# Altium PCB PCB1.PcbDoc (part 1 of 2)
Units mil, origin at the board's own origin, x right, y up, seen from the top; angles counter-clockwise.
Board outline 2600 x 2600 mil, 4 copper layers (Top Layer, Layer 1, Layer 2, Bottom Layer), stack 68.756 mil thick; 75 components, 74 nets, 370 pads, 169 vias.
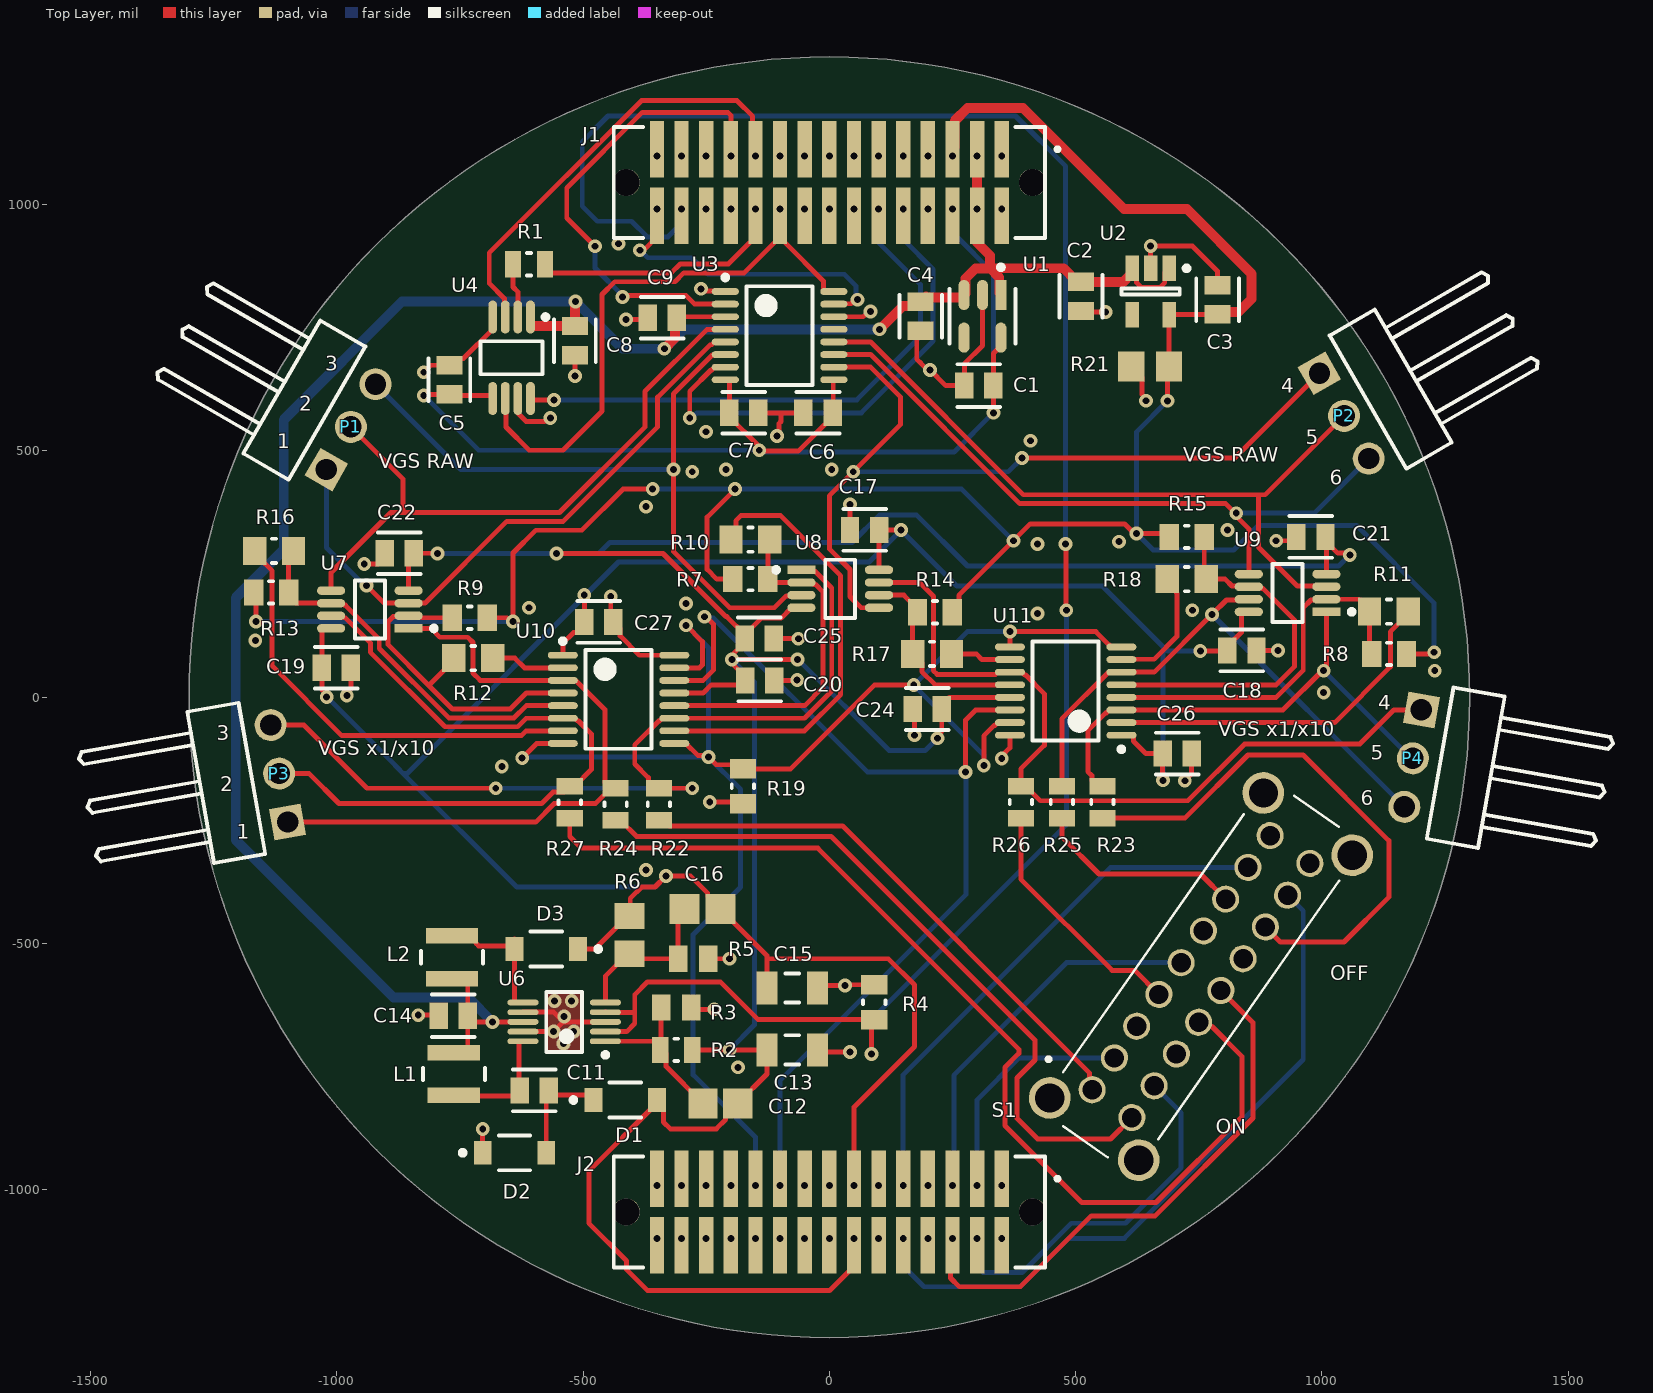
[diagram p0: Top Layer view]
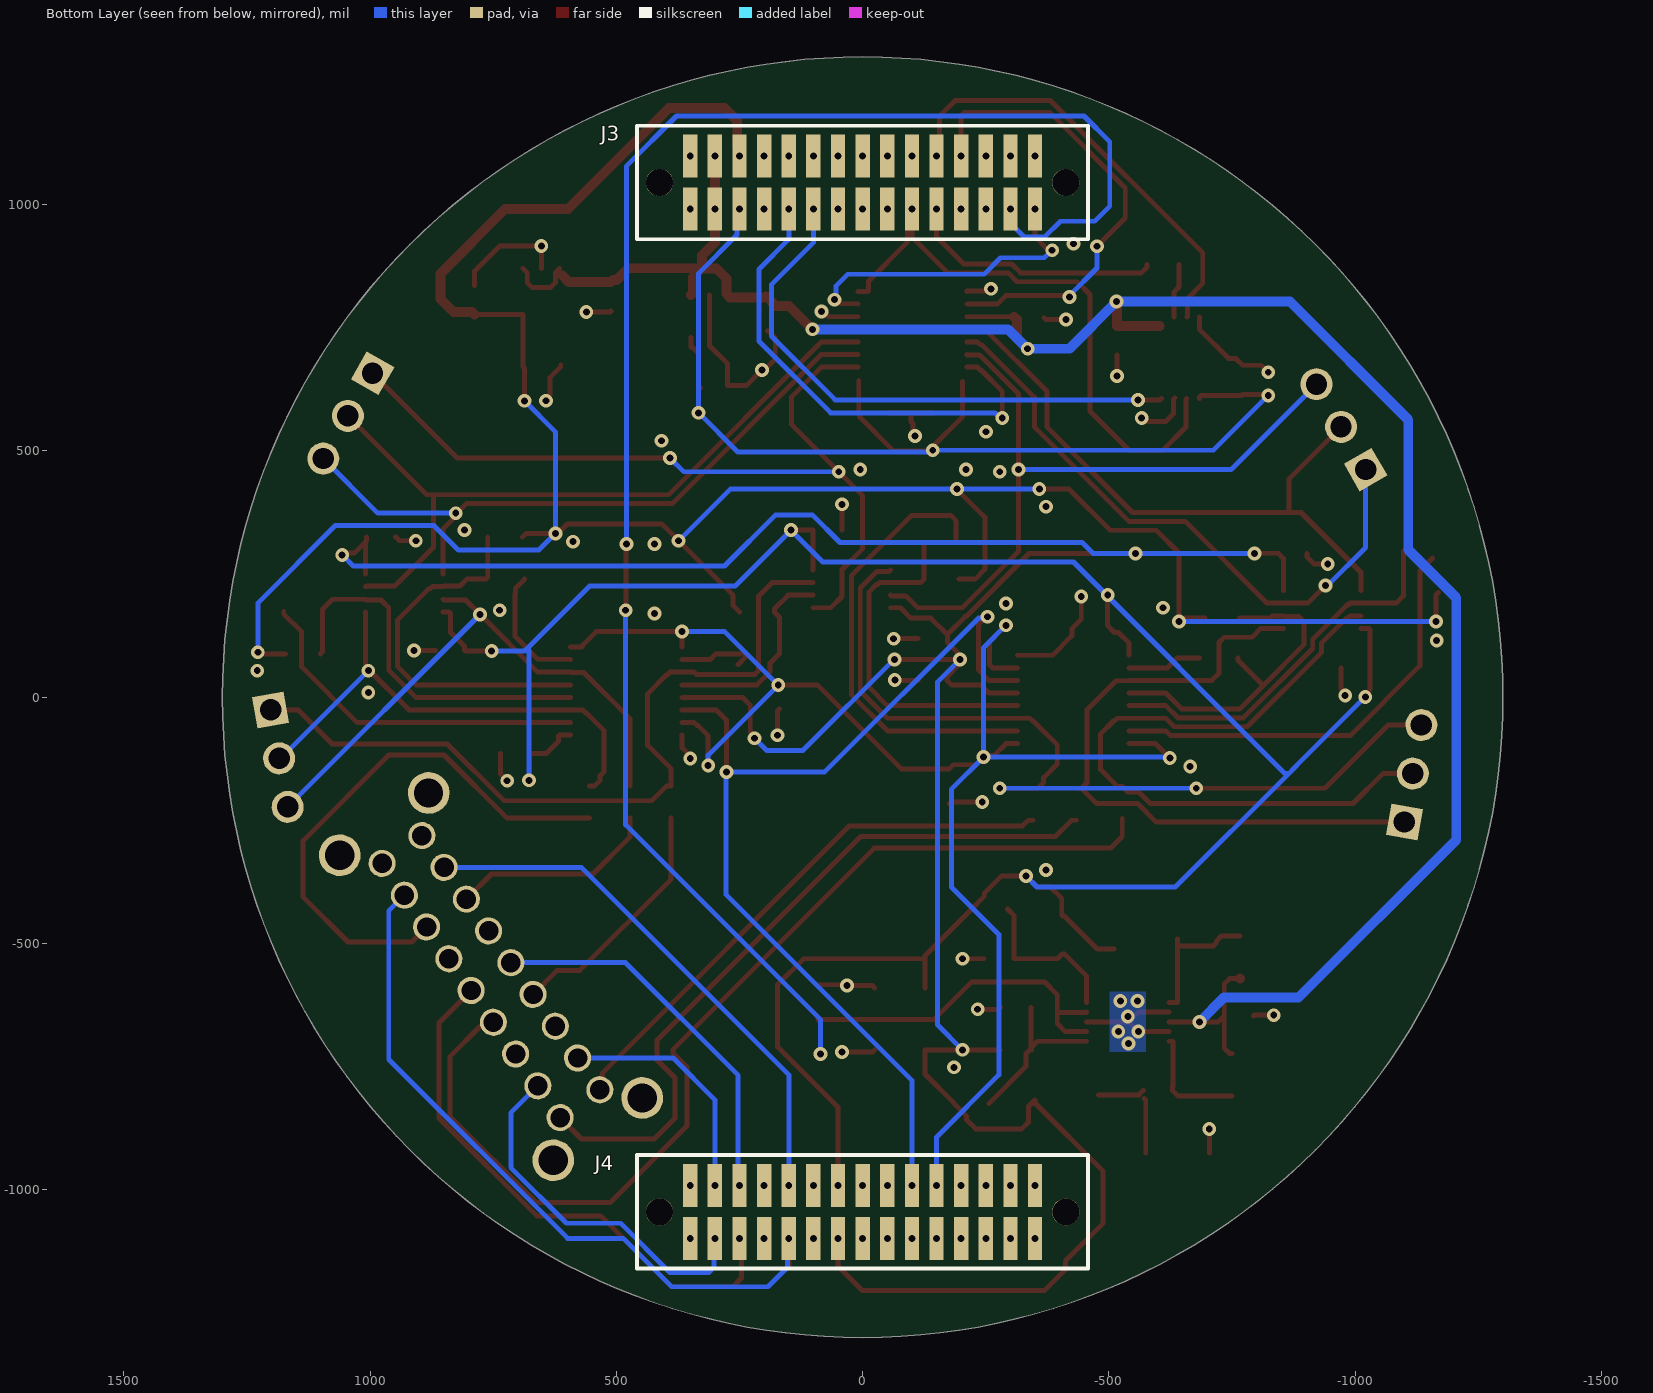
[diagram p1: Bottom Layer view, seen from below]
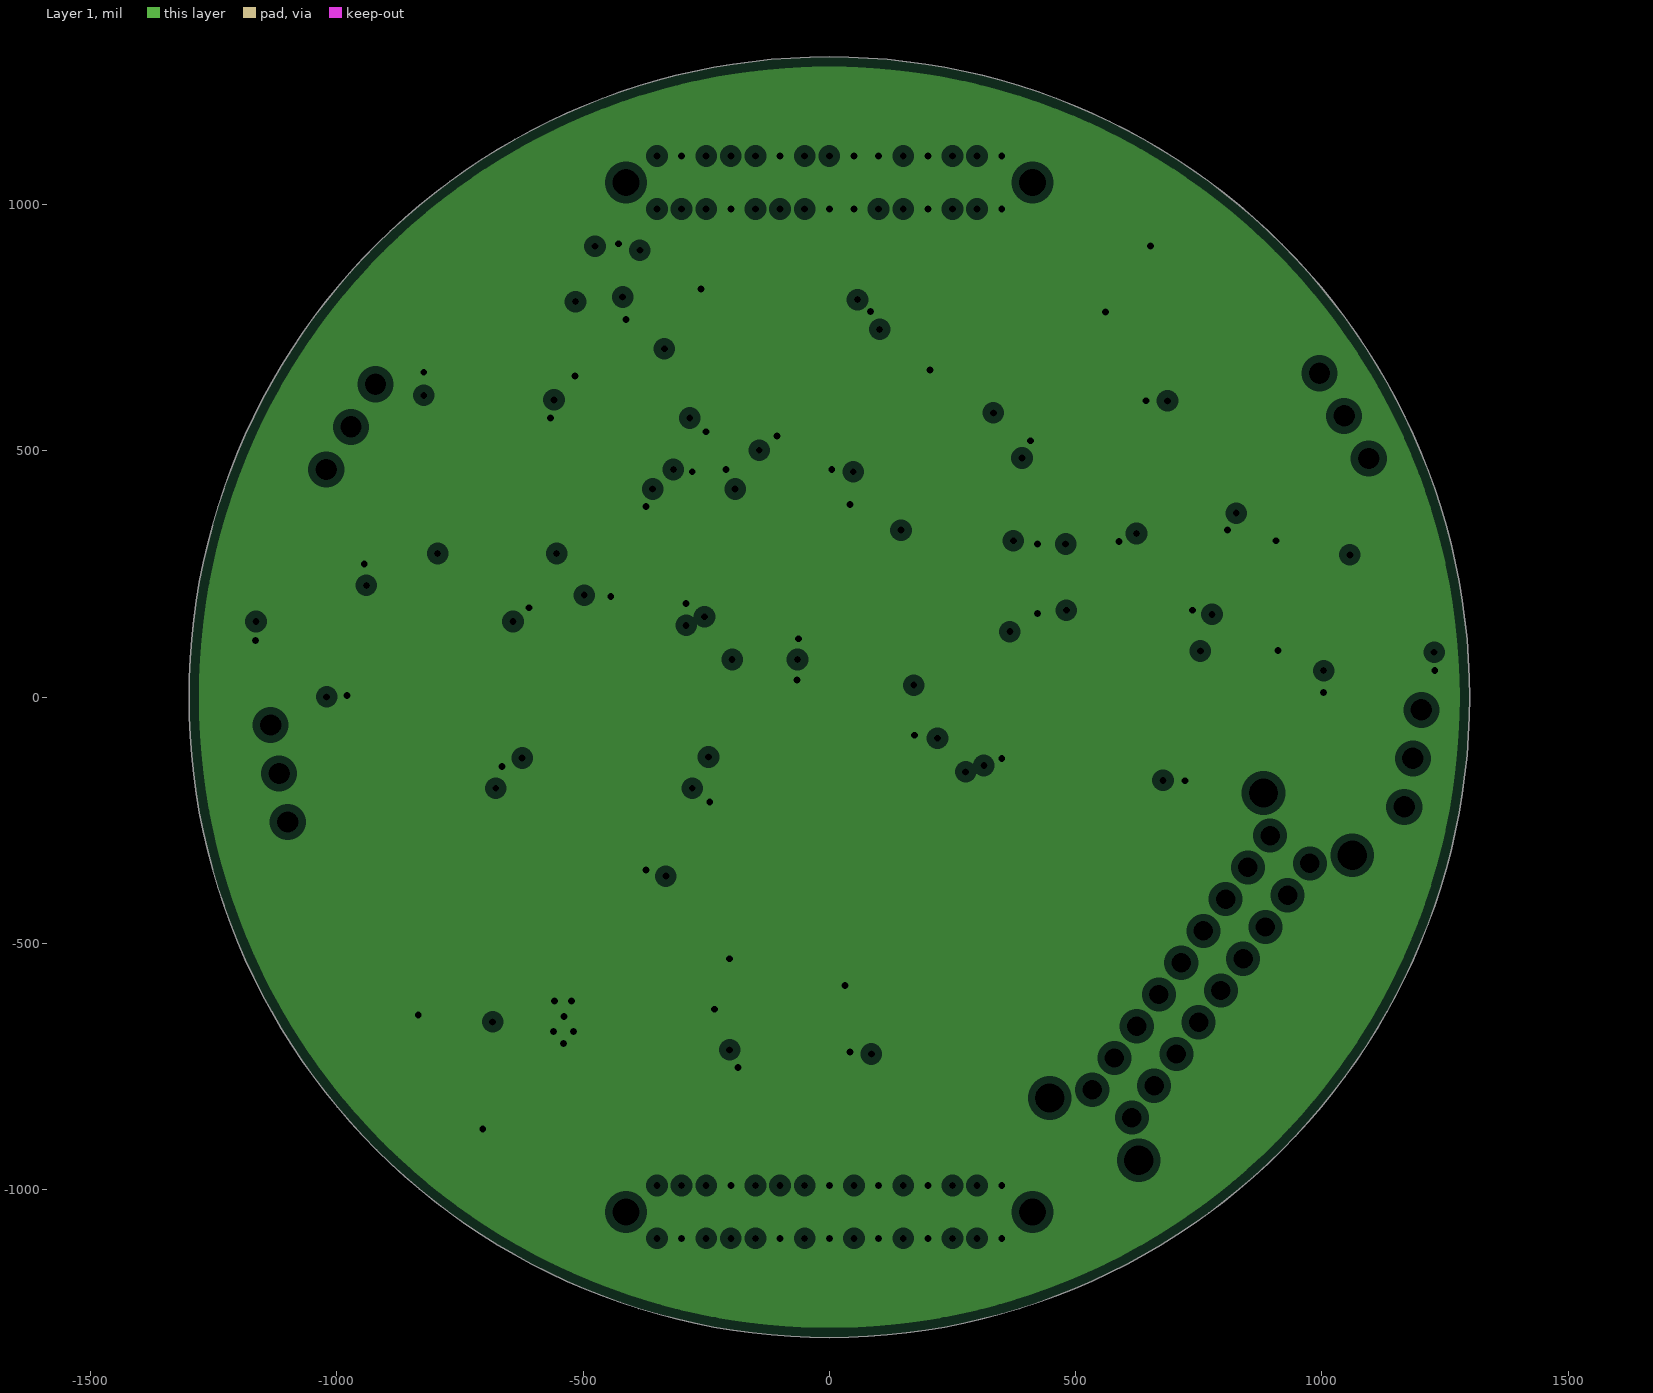
[diagram p2: Layer 1, clearances drawn from the general rule]
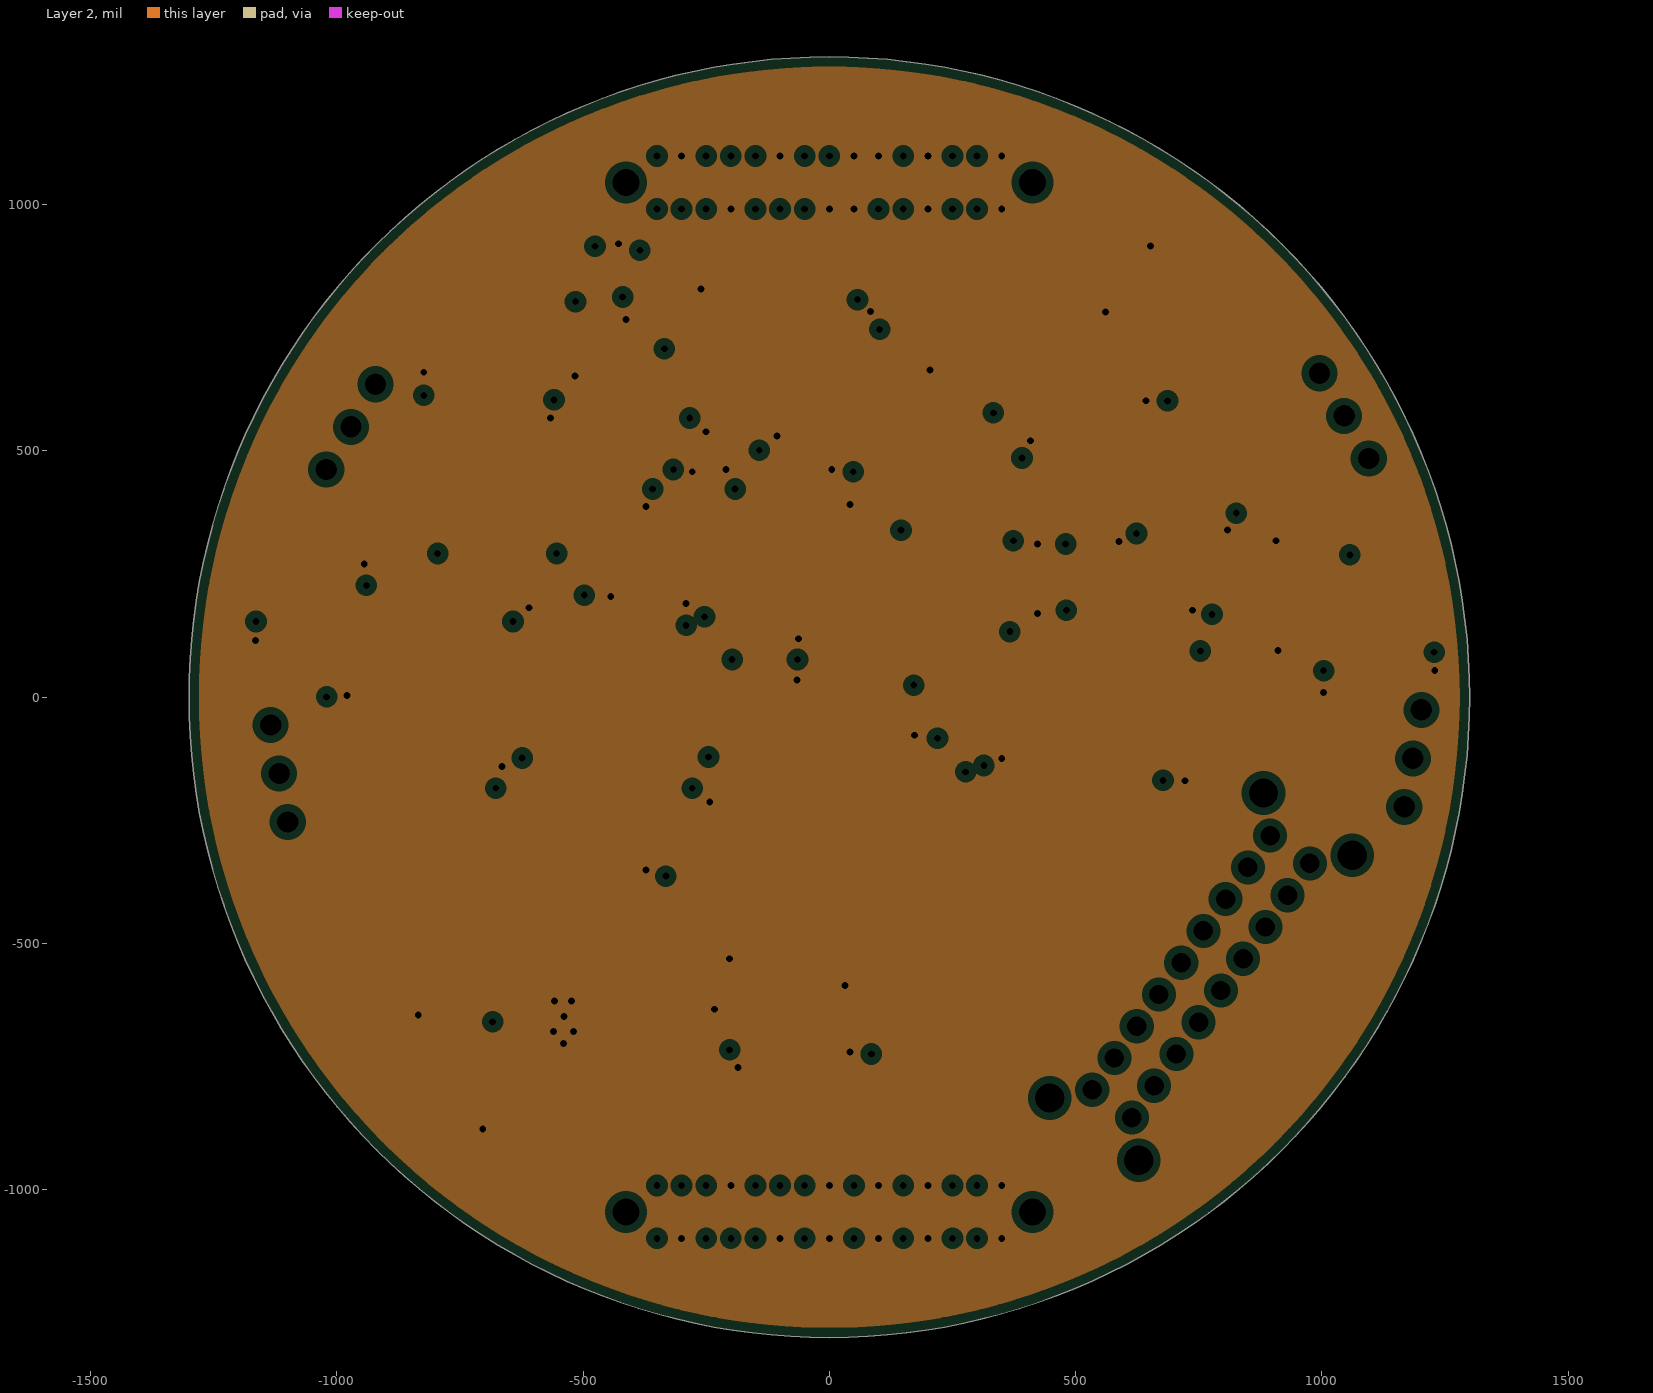
[diagram p3: Layer 2, clearances drawn from the general rule]
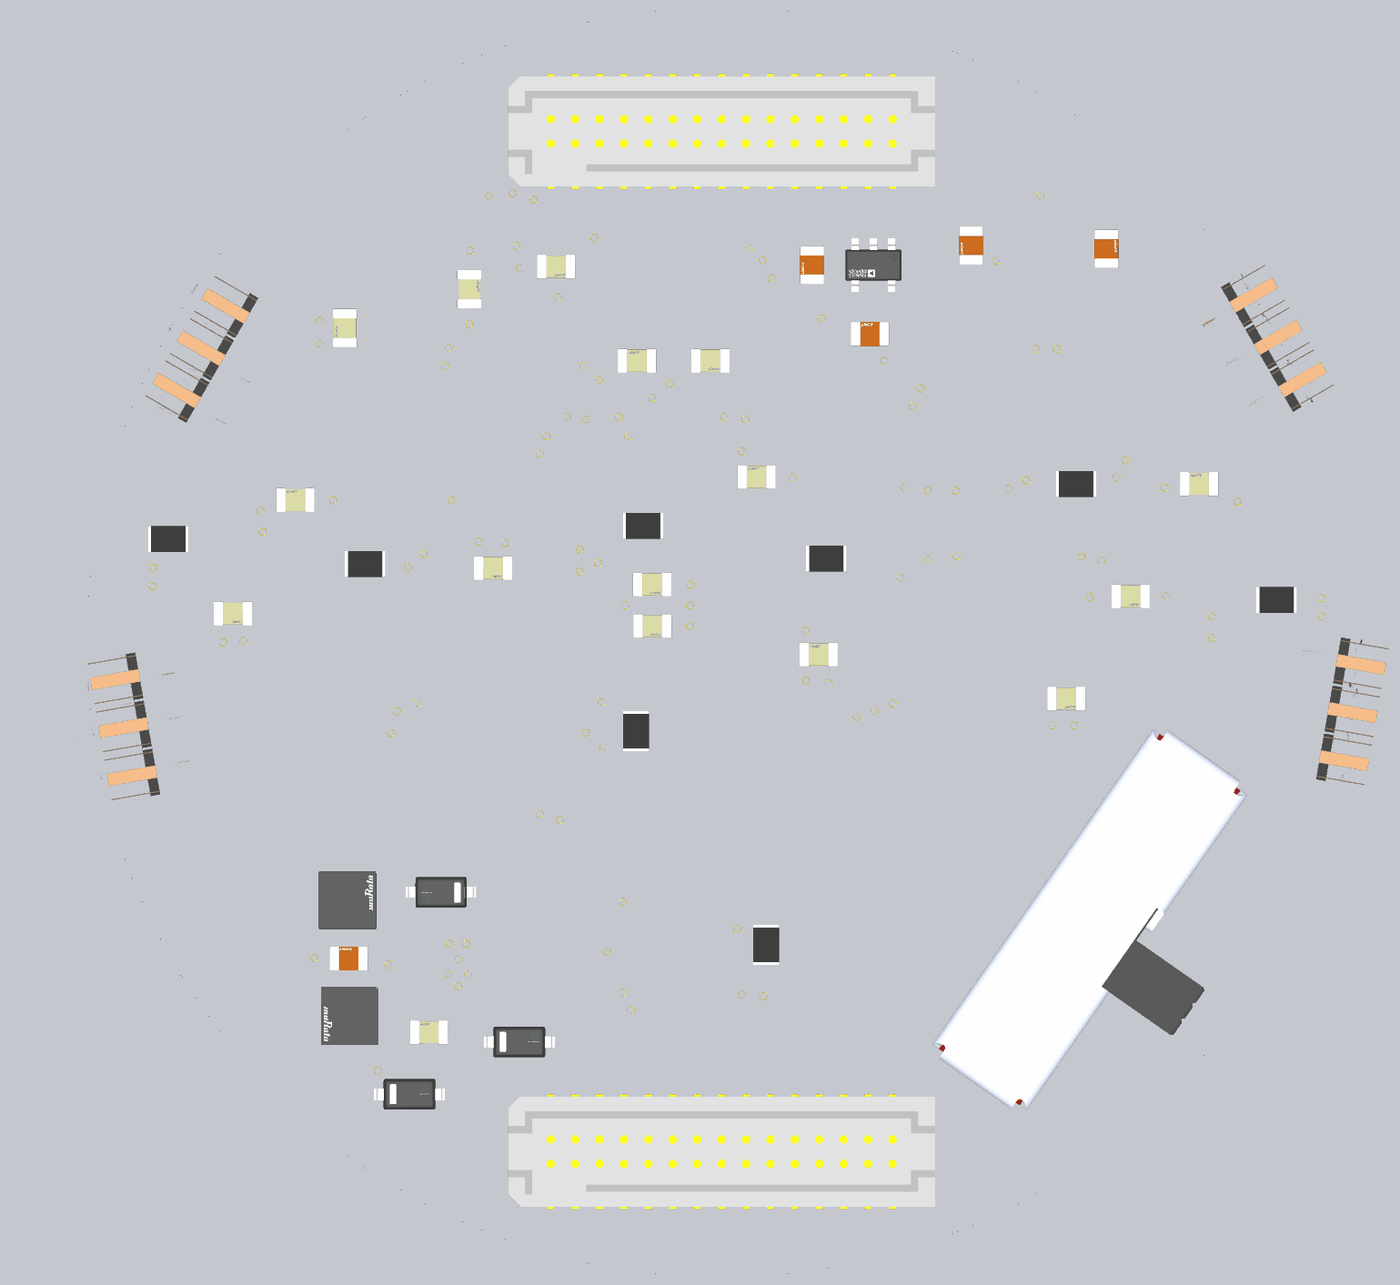
[diagram p4: 3D render of the assembled board from above, using the file's embedded part models]

## Layer stack, top to bottom
Top Solder: solder mask 0.5, Solder Resist, Dk 3.3
Top Layer: signal copper 0.7
Dielectric 1: prepreg 2.8, PP-006, Dk 4.1
Layer 1: plane copper 1.378, net GND
Dielectric1: core 59, FR-4, Dk 4.3
Layer 2: plane copper 1.378, net GND
Dielectric 2: prepreg 2.8, PP-006, Dk 4.1
Bottom Layer: signal copper 0.7
Bottom Solder: solder mask 0.5, Solder Resist, Dk 3.3

## Board outline
-1300,0 ccw(c0,0) 0,-1300 ccw(c0,0) 1300,0 ccw(c0,0) 0,1300 ccw(c0,0)

## Design rules (kind name [scope] priority, off if disabled: settings)
Clearance [All] p1: gap=8 ignorepadtopadclearanceinfootprint=FALSE except(6: SMDPad-SMDPad; 12: Arc-Via Track-Via)
DiffPairsRouting [All] p1: maxlimit=10 minlimit=10 mostfreqgap=10 toplayer_minwidth=10 toplayer_maxwidth=10 toplayer_prefwidth=10 bottomlayer_minwidth=10 bottomlayer_maxwidth=10 bottomlayer_prefwidth=10 maxuncoupledlength=500
HoleSize [All] p1: absolutevalues=TRUE maxlimit=300 minlimit=10 maxpercent=80.000 minpercent=20.000
MinimumAnnularRing [All] p1: minimumring=7
MinimumSolderMaskSliver [All] p1: minsoldermaskwidth=0
PasteMaskExpansion [All] p1: expansion=10
PlaneClearance [All] p1: clearance=15
PlaneConnect [All] p1: pad.planeconnectstyle=Relief pad.reliefexpansion=20 pad.reliefentries=4 pad.reliefconductorwidth=10 pad.reliefairgap=10 via.planeconnectstyle=Direct via.reliefexpansion=20 via.reliefentries=4 via.reliefconductorwidth=10 via.reliefairgap=10
PolygonConnect [All] p1: thpad.connectstyle=Relief thpad.reliefconductorwidth=10 thpad.reliefentries=4 thpad.polygonreliefangle="90 Angle" thpad.airgapwidth=10 smdpad.connectstyle=Relief smdpad.reliefconductorwidth=10 smdpad.reliefentries=4 smdpad.polygonreliefangle="90 Angle" smdpad.airgapwidth=10 via.connectstyle=Direct via.reliefconductorwidth=10 via.reliefentries=4 via.polygonreliefangle="90 Angle" via.airgapwidth=10
RoutingVias [All] p1: holewidth=14 width=28 viastyle="Through Hole" minholewidth=14 minwidth=28 maxholewidth=14 maxwidth=28
SMDNeckDown [All] p1: percent=150.000
SilkToSolderMaskClearance SilkscreenOverComponentPads [IsPad] p1: minsilkscreentomaskgap=0 clearancetoexposedcopper=TRUE
SolderMaskExpansion [All] p1: expansion=10 istentingtop=FALSE
Width [All] p1: maxlimit=30 minlimit=10 preferedwidth=10
23 further rules are at their usual default settings.

## Components (designator, comment, footprint, x,y, rotation, side; value= is the part's Value field where it differs from the comment)
C1 "4.7 uF" FP-C0805C475K3PACTU-MFG 303.55,632.61 r180 top
C2 "4.7 uF" FP-C0805C475K3PACTU-MFG 510.93,813.62 r270 top
C3 "4.7 uF" FP-C0805C475K3PACTU-MFG 788.14,806.63 r90 top
C4 "4.7 uF" FP-C0805C475K3PACTU-MFG 185.43,773.3 r270 top
C5 "100 nF" FP-C0805C-DN-MFG -771.4,644.43 r90 top value="0.10 μF"
C6 "100 nF" FP-C0805C-DN-MFG -22.98,577.3 r180 top value="0.10 μF"
C7 "100 nF" FP-C0805C-DN-MFG -173.44,577.3 r0 top value="0.10 μF"
C8 "100 nF" FP-C0805C-DN-MFG -516.6,724.07 r270 top value="0.10 μF"
C9 "100 nF" FP-C0805C-DN-MFG -338.91,770.32 r180 top value="0.10 μF"
C11 "100 nF" FP-C0805C-DN-MFG -599.3,-798.23 r0 top value="0.10 μF"
C12 "100 pF" CAPC2013X140X50ML20T25 -221.28,-825.33 r180 top
C13 "1 uF" CAPC3216X110X50LL20T25 -75.35,-716 r180 top
C14 "4.7 uF" FP-C0805C475K3PACTU-MFG -763.65,-646.88 r180 top
C15 "1 uF" CAPC3216X110X50LL20T25 -75.35,-590.33 r0 top
C16 "4.7 pF" CAPC2013X71X50ML20T25 -257.7,-430 r180 top
C17 "100 nF" FP-C0805C-DN-MFG 71.54,339.52 r0 top value="0.10 μF"
C18 "100 nF" FP-C0805C-DN-MFG 837.7,95.04 r180 top value="0.10 μF"
C19 "100 nF" FP-C0805C-DN-MFG -1000.79,59.61 r180 top value="0.10 μF"
C20 "100 nF" FP-C0805C-DN-MFG -142.28,119.39 r180 top value="0.10 μF"
C21 "100 nF" FP-C0805C-DN-MFG 977.8,325.4 r0 top value="0.10 μF"
C22 "100 nF" FP-C0805C-DN-MFG -872.87,292.18 r0 top value="0.10 μF"
C24 "100 nF" FP-C0805C-DN-MFG 198.75,-24.05 r0 top value="0.10 μF"
C25 "100 nF" FP-C0805C-DN-MFG -141.55,34.02 r180 top value="0.10 μF"
C26 "100 nF" FP-C0805C-DN-MFG 706.14,-114.6 r180 top value="0.10 μF"
C27 "100 nF" FP-C0805C-DN-MFG -467.94,152.85 r180 top value="0.10 μF"
D1 "MBR0530" FP-425-04-MFG -414.26,-817.92 r0 top
D2 "MBR0530" FP-425-04-MFG -639.2,-925.01 r0 top
D3 "MBR0530" FP-425-04-MFG -574.7,-511.32 r180 top
J1 "TFM-115-02-L-D" SAMTEC_TFM-115-02-L-D 0,1045 r180 top locked
J2 "TFM-115-02-L-D" SAMTEC_TFM-115-02-L-D 0,-1045 r180 top locked
J3 "SAMTEC-SFM-115-02-X-D-A" SAMTEC-SFM-115-02-X-D-A 0,1045 r180 bottom locked
J4 "SAMTEC-SFM-115-02-X-D-A" SAMTEC-SFM-115-02-X-D-A 0,-1045 r180 bottom locked
L1 "LQH3NPN100MMEL" FP-LQH3NPH_ME-MFG -762.28,-765.03 r270 top
L2 "LQH3NPN100MMEL" FP-LQH3NPH_ME-MFG -765.93,-528 r90 top
P1 "DNP" 61300311021 -1065.71,603.29 r240 top
P2 "DNP" 61300311021 1139.57,625.61 r120 top
P3 "DNP" 61300311021 -1224.37,-174.02 r280 top
P4 "DNP" 61300311021 1292.09,-143.15 r80 top
R1 "100" RESC2013X50X30LL20T20 -609.72,878.95 r0 top
R2 "196k" RESC2013X50X30LL20T20 -310.85,-716 r0 top
R3 "24.9k" RESC2013X70X40LL20T20 -310.85,-629.7 r180 top
R4 "10k" RESC2013X60X35NL10T20 91.23,-619.2 r270 top
R5 "24.9k" RESC2013X70X40LL20T20 -276.4,-531 r0 top
R6 "220k" RESC2013X70X40ML20T20 -405.41,-482.62 r270 top
R7 "10k" RESC2013X60X35NL10T20 -160.25,239.7 r180 top
R8 "10k" RESC2013X60X35NL10T20 1136.45,87.89 r0 top
R9 "10k" RESC2013X60X35NL10T20 -730.06,161.26 r0 top
R10 "91k" RESC2013X60X35ML10T20 -160.25,319.84 r180 top
R11 "91k" RESC2013X60X35ML10T20 1136.05,173.63 r0 top
R12 "91k" RESC2013X60X35ML10T20 -722.91,79.29 r0 top
R13 "10k" RESC2013X60X35NL10T20 -1133.28,212.62 r180 top
R14 "10k" RESC2013X60X35NL10T20 214.49,172.54 r0 top
R15 "10k" RESC2013X60X35NL10T20 725.83,325.4 r180 top
R16 "91k" RESC2013X60X35ML10T20 -1127.38,297.09 r180 top
R17 "91k" RESC2013X60X35ML10T20 208.59,87.89 r0 top
R18 "91k" RESC2013X60X35ML10T20 725.68,239.7 r180 top
R19 "10k" RESC2013X60X35NL10T20 -175.45,-180.91 r270 top
R21 "470" RESC2013X70X40ML20T20 651.43,671 r0 top
R22 "100" RESC2013X50X30LL20T20 -345.91,-217.33 r270 top
R23 "100" RESC2013X50X30LL20T20 554.46,-212.97 r270 top
R24 "100" RESC2013X50X30LL20T20 -433.95,-217.33 r270 top
R25 "100" RESC2013X50X30LL20T20 472.14,-212.97 r270 top
R26 "100" RESC2013X50X30LL20T20 389,-212.97 r270 top
R27 "100" RESC2013X50X30LL20T20 -527,-213.39 r270 top
S1 "EG6201" SW_EG6201 754.65,-567.27 r55 top
U1 "ADP150AUJZ-2.0-R7" FP-UJ-5-IPC_B 310.96,773.3 r270 top
U2 "LD39015M10R" SOT23-5L_M 652.41,823.47 r270 top
U3 "AD5328BRUZ" RU-16_L -100.98,733.99 r0 top
U4 "AD7274BRMZ" RM-8_N -645.16,689.05 r270 top
U6 "LT1945EMS#PBF" LT-MS-10_N -538.28,-659.23 r180 top
U7 "ADA4522-2ARMZ" FP-RM-8-IPC_C -932.84,178 r180 top
U8 "ADA4522-2ARMZ" FP-RM-8-IPC_C 22.07,220.01 r0 top
U9 "ADA4522-2ARMZ" FP-RM-8-IPC_C 930.41,211.56 r180 top
U10 "ADG5433BRUZ" ADI-RU-16_N -427.93,-4.37 r0 top
U11 "ADG5433BRUZ" ADI-RU-16_N 479.76,12.36 r180 top

## Footprints (in the part's own frame and the unit in brackets; to place one, negate y for a bottom-side part, rotate by r counter-clockwise, add the part's x,y. Pads: shape width x height; smd on the part's side, far side on the other; paste and mask are expansions set on the pad)
61300311021 [mm] "Pin Header, pitch 2.54 mm, THT, Angled, single row, 3p"
  rect 1.65x1.65 hole 1.1: 1(2.54,2.77)
  round 1.65 hole 1.1: 2(0,2.77) 3(-2.54,2.77)
  silkscreen extent -3.96,-7.27 3.96,1.34, body extent -3.81,-7.27 3.81,3.09, height 2.58
ADI-RU-16_N [mm] "SOP, 16-Leads, Body 5x4.4mm, Pitch 0.65mm, IPC Medium Density"
  oval 1.55x0.35 smd: 1(-2.875,2.275) 2(-2.875,1.625) 3(-2.875,0.975) 4(-2.875,0.325) 5(-2.875,-0.325) 6(-2.875,-0.975) 7(-2.875,-1.625) 8(-2.875,-2.275) 9(2.875,-2.275) 10(2.875,-1.625) 11(2.875,-0.975) 12(2.875,-0.325) 13(2.875,0.325) 14(2.875,0.975) 15(2.875,1.625) 16(2.875,2.275)
  silkscreen extent -3,-2.55 1.7,3.12, body extent -2.25,-2.55 2.25,2.55, height 1.2
CAPC2013X71X50ML20T25 [mm] "Chip Capacitor, 2-Leads, Body 2.01x1.25mm, IPC Low Density"
  rect 1.55x1.55 smd: 1(-0.925,0) 2(0.925,0)
  body extent -1.1,-0.73 1.11,0.73, height 0.71
CAPC2013X140X50ML20T25 [mm] "Chip Capacitor, 2-Leads, Body 2.00x1.25mm, IPC Low Density"
  rect 1.5x1.55 smd: 1(-0.9,0) 2(0.9,0)
  body extent -1.1,-0.72 1.1,0.72, height 1.4
CAPC3216X110X50LL20T25 [mm] "Chip Capacitor, 2-Leads, Body 3.20x1.60mm, IPC High Density"
  rect 1.1x1.7 smd: 1(-1.3,0) 2(1.3,0)
  silkscreen extent -0.35,-0.75 0.35,0.75, body extent -1.7,-0.9 1.7,0.9, height 1.1
FP-425-04-MFG [mil]
  rect 36x48 smd paste+0 mask+0: 1(-64.5,0) 2(64.5,0)
  silkscreen extent -110,-35 32,35, body extent -86,-39 86,39, height 10
FP-C0805C475K3PACTU-MFG [mm]
  rect 0.95x1.35 smd paste+0 mask+0: 1(-0.75,0) 2(0.75,0)
  silkscreen extent -1.1,-1.1 1.1,1.1, body extent -1.4,-0.85 1.4,0.85, height 0.25
FP-C0805C-DN-MFG [mm]
  rect 0.95x1.35 smd paste+0 mask+0: 1(-0.75,0) 2(0.75,0)
  silkscreen extent -1.1,-1.07 1.1,1.07, body extent -1.4,-0.85 1.4,0.85, height 0.25
FP-LQH3NPH_ME-MFG [mm]
  rect 0.8x2.7 smd paste+0 mask+0: 1(-1.1,0) 2(1.1,0)
  silkscreen extent -0.33,-1.6 0.33,1.6, body extent -1.7,-1.7 1.7,1.7, height 0.25
FP-RM-8-IPC_C [mm]
  rect 1.454x0.436 smd paste+0 mask+0: 1(-2,0.975)
  rrect100% 1.454x0.436 smd paste+0 mask+0: 2(-2,0.325) 3(-2,-0.325) 4(-2,-0.975) 5(2,-0.975) 6(2,-0.325) 7(2,0.325) 8(2,0.975)
  silkscreen extent -3.43,-1.5 0.77,1.5
FP-UJ-5-IPC_B [mm]
  rect 1.554x0.572 smd paste+0 mask+0: 1(-1.1,0.95)
  rrect100% 1.554x0.572 smd paste+0 mask+0: 2(-1.1,0) 3(-1.1,-0.95) 4(1.1,-0.95) 5(1.1,0.95)
  silkscreen extent -2.65,-1.7 1.4,1.7, body extent -2.13,-1.7 2.13,1.7, height 0.25
LT-MS-10_N [mm] "SOP, 10-Leads, Body 3.1x3.1mm, Pitch 0.5mm, IPC Medium Density"
  oval 1.6x0.3 smd: 1(-2.125,1) 2(-2.125,0.5) 3(-2.125,0) 4(-2.125,-0.5) 5(-2.125,-1) 6(2.125,-1) 7(2.125,-0.5) 8(2.125,0) 9(2.125,0.5) 10(2.125,1)
  silkscreen extent -2.25,-1.55 0.92,1.82, body extent -1.55,-1.55 1.55,1.55, height 1.1
RESC2013X50X30LL20T20 [mm] "Chip Resistor, 2-Leads, Body 2.00x1.25mm, IPC High Density"
  rect 0.85x1.35 smd: 1(-0.825,0) 2(0.825,0)
  silkscreen extent -0.1,-0.58 0.1,0.58, body extent -1.1,-0.73 1.1,0.73, height 0.5
RESC2013X60X35ML10T20 [mm] "Chip Resistor, 2-Leads, Body 2.00x1.25mm, IPC Low Density"
  rect 1.2x1.45 smd: 1(-1,0) 2(1,0)
  silkscreen extent -0.1,-0.63 0.1,0.63, body extent -1.05,-0.67 1.05,0.67, height 0.6
RESC2013X60X35NL10T20 [mm] "Chip Resistor, 2-Leads, Body 2.1x1.35mm, IPC Medium Density"
  rect 1x1.35 smd: 1(-0.9,0) 2(0.9,0)
  silkscreen extent -0.1,-0.58 0.1,0.58, body extent -1.05,-0.68 1.05,0.67, height 0.6
RESC2013X70X40LL20T20 [mm] "Chip Resistor, 2-Leads, Body 2.00x1.25mm, IPC High Density"
  rect 0.95x1.35 smd: 1(-0.775,0) 2(0.775,0)
  body extent -1.1,-0.73 1.1,0.72, height 0.7
RESC2013X70X40ML20T20 [mm] "Chip Resistor, 2-Leads, Body 2.00x1.25mm, IPC Low Density"
  rect 1.35x1.55 smd: 1(-0.975,0) 2(0.975,0)
  body extent -1.1,-0.73 1.1,0.73, height 0.7
RM-8_N [mm] "TSOP, 8-Leads, Body 3x3mm, Pitch 0.65mm, IPC Medium Density"
  oval 1.7x0.45 smd: 1(-2.1,0.975) 2(-2.1,0.325) 3(-2.1,-0.325) 4(-2.1,-0.975) 5(2.1,-0.975) 6(2.1,-0.325) 7(2.1,0.325) 8(2.1,0.975)
  silkscreen extent -2.22,-1.6 0.85,1.88, body extent -1.6,-1.6 1.6,1.6, height 1.1
RU-16_L [mm] "TSOP, 16-Leads, Body 5x4.4mm, Pitch 0.65mm, IPC High Density"
  oval 1.4x0.35 smd: 1(-2.8,2.275) 2(-2.8,1.625) 3(-2.8,0.975) 4(-2.8,0.325) 5(-2.8,-0.325) 6(-2.8,-0.975) 7(-2.8,-1.625) 8(-2.8,-2.275) 9(2.8,-2.275) 10(2.8,-1.625) 11(2.8,-0.975) 12(2.8,-0.325) 13(2.8,0.325) 14(2.8,0.975) 15(2.8,1.625) 16(2.8,2.275)
  silkscreen extent -2.92,-2.55 1.7,3.12, body extent -2.25,-2.55 2.25,2.55, height 1.2
SAMTEC-SFM-115-02-X-D-A [mm]
  rect 0.74x2.22 smd mask+0: 1(-8.89,1.365) 2(-8.89,-1.365) 3(-7.62,1.365) 4(-7.62,-1.365) 5(-6.35,1.365) 6(-6.35,-1.365) 7(-5.08,1.365) 8(-5.08,-1.365) 9(-3.81,1.365) 10(-3.81,-1.365) 11(-2.54,1.365) 12(-2.54,-1.365) 13(-1.27,1.365) 14(-1.27,-1.365) 15(0,1.365) 16(0,-1.365) 17(1.27,1.365) 18(1.27,-1.365) 19(2.54,1.365) 20(2.54,-1.365) 21(3.81,1.365) 22(3.81,-1.365) 23(5.08,1.365) 24(5.08,-1.365) 25(6.35,1.365) 26(6.35,-1.365) 27(7.62,1.365) 28(7.62,-1.365) 29(8.89,1.365) 30(8.89,-1.365)
  round 1.4 hole 1.4 unplated: ""(-10.478,0) ""(10.478,0)
  silkscreen extent -11.63,-2.93 11.63,2.93, body extent -11.11,-2.16 11.11,2.04, height 4.7
SAMTEC_TFM-115-02-L-D [mm]
  rect 0.74x2.92 smd: 01(-8.89,-1.715) 02(-8.89,1.715) 03(-7.62,-1.715) 04(-7.62,1.715) 05(-6.35,-1.715) 06(-6.35,1.715) 07(-5.08,-1.715) 08(-5.08,1.715) 09(-3.81,-1.715) 10(-3.81,1.715) 11(-2.54,-1.715) 12(-2.54,1.715) 13(-1.27,-1.715) 14(-1.27,1.715) 15(0,-1.715) 16(0,1.715) 17(1.27,-1.715) 18(1.27,1.715) 19(2.54,-1.715) 20(2.54,1.715) 21(3.81,-1.715) 22(3.81,1.715) 23(5.08,-1.715) 24(5.08,1.715) 25(6.35,-1.715) 26(6.35,1.715) 27(7.62,-1.715) 28(7.62,1.715) 29(8.89,-1.715) 30(8.89,1.715)
  silkscreen extent -11.87,-2.86 11.11,2.86, body extent -11.11,-3.05 11.11,2.92, height 5.71
SOT23-5L_M [mm] "SOT23, 5-Leads, Body 2.9x1.6mm, Pitch 0.95mm, Lead Span 2.8mm, IPC Low Density"
  rect 1.3x0.7 smd: 1(-1.2,0.95) 2(-1.2,0) 3(-1.2,-0.95) 4(1.2,-0.95) 5(1.2,0.95)
  silkscreen extent -1.32,-1.5 0.15,1.98, body extent -0.87,-1.5 0.87,1.5, height 1.45
SW_EG6201 [mm]
  round 1.4 hole 1: 1(-8,1.25) 2(-6,1.25) 3(-4,1.25) 4(-2,1.25) 5(0,1.25) 6(2,1.25) 7(4,1.25) 8(6,1.25) 9(8,1.25) 10(-8,-1.25) 11(-6,-1.25) 12(-4,-1.25) 13(-2,-1.25) 14(0,-1.25) 15(2,-1.25) 16(4,-1.25) 17(6,-1.25) 18(8,-1.25)
  round 2.15 hole 1.5: S1(-9.6,2.8) S2(-9.6,-2.8) S3(9.6,2.8) S4(9.6,-2.8)
  silkscreen extent -10.4,-3 10.4,4.1, body extent -10.41,-6.98 10.39,3.02, height 5

## Part data
C1 C2 C3 C4 C14: library part CMP-2007-01010-2, "CAP CER 4.7UF 25V X5R 0805", Capacitance=4.7uF, Case Code (Imperial)=0805, Case Code (Metric)=2012, Dielectric=X5R, Dielectric Material=Ceramic, Max Operating Temperature=85°C, Min Operating Temperature=-55°C, Package Quantity=2500, Tolerance=10%, Voltage=25V, Case/Package=0805, Construction=Flat, Contact Plating=Tin, Depth=1.25mm, Dissipation Factor=5%, Height=1.25mm, Lead Free="Lead Free", Length=2mm, Mount=PCB, Number of Pins=2, Packaging="Tape and Reel", Radiation Hardening=No, REACH SVHC="No SVHC", RoHS Compliant=Yes, Series=C0805C, Termination=SMD/SMT, Voltage Rating (DC)=25V, Width=1.2mm
C5 C6 C7 C8 C9 C11 C17 C18 C19 C20 C21 C22 C24 C25 C26 C27: library part CMP-2007-00279-2, "CAP CER 0.1UF 50V X7R 0805", Capacitance="0.10 μF", Manufacturer=KEMET, Manufacturer Part Number=C0805C104K5RACTU, Package=C0805C-DN, Temperature="-55°C to +125°C", Temperature Characteristic=X7R, Temperature Coefficient=30ppm/°C, Temperature Range High=+125°C, Temperature Range Low=-55°C, Tolerance=0.1, Voltage Rating="50 V", Automotive=No, Category=Cap, ComponentLink2Description=Datasheet, ComponentLink2URL=https://content.kemet.com/datasheets/KEM_C1003_C0G_SMD.pdf, Device Class L1="Passive Components", Device Class L2=Capacitors, Device Class L3="Ceramic Capacitors", Digikey Description="CAP CER 0.1UF 50V X7R 0805", Height=0.88mm, Ipc Land Pattern Name=CAPC200125X78, Lead Free=Yes, Material=Ceramic, Mouser Description="Cap Ceramic 0.1uF 50V X7R 10% SMD 2.0 x 1.2 mm 125 C Paper T/R", Octopart=https://octopart.com/c0805c104k5ractu-kemet-143926, RoHS=TRUE
C12: library part CMP-2007-04713-1, "08055C101KAT2A", Manufacturer="AVX Interconnect / Elco", Part Number=08055C101KAT2A
C13 C15: library part CMP-2000-06011-1, "C1206C105K5RACTU", Capacitance=1uF, Capacitance - nF=1000nF, Case Code - in=1206, Case Code - mm=3216, Case Height=1mm, Case Length=3.2mm, Case Width=1.6mm, Dielectric=X7R, Manufacturer=Kemet, Maximum Operating Temperature=+125C, Minimum Operating Temperature=-55C, Operating Temperature Range=-55Cto+125C, Package / Case=1206(3216metric), Package Description="2-Pin Surface Mount Device, Body 3.2 x 1.6 mm", Temperature Coefficient / Code=+/-15%, Tolerance=10%, Voltage Rating=50V, Brand=Kemet, Class=Class1, Datasheet URL=http://www.kemet.com/docfinder?Partnumber=C1206C105K5RACTU, Datasheet Version=02/2016, Dimensions=1.6mmWx3.2mmLx1mmH, Factory Pack Quantity=2500, Manufacturer URL=http://www.kemet.com/, Mounting Technology=SurfaceMount, Package Reference=1206, Packaging=Reel, Product=GeneralTypeMLCCs, Product Category=MultilayerCeramicCapacitorsMLCC-SMD/SMT, RoHS=Details, Series=C1206C, Termination Style=SMD/SMT, Type=SMDMLCCX7R6.3-250VDCCommericalGrade, Voltage Rating DC=50V
C16: library part CMP-1036-00549-2, "08055A4R7CAT2A", Manufacturer="AVX Interconnect / Elco", Part Number=08055A4R7CAT2A
D1 D2 D3: library part CMP-2000-05113-2, "DIODE SCHOTTKY 30V 500MA SOD123", Average Rectified Current=500mA, Forward Voltage=430mV, Max Forward Surge Current (Ifsm)=5.5A, Max Operating Temperature=150°C, Max Repetitive Reverse Voltage (Vrrm)=30V, Max Reverse Leakage Current=130uA, Min Operating Temperature=-65°C, Package Quantity=1, Contact Plating=Tin, Current Rating=500mA, Element Configuration=Single, Forward Current=500mA, Height=1.03mm, Lead Free="Lead Free", Length=2.7mm, Max Reverse Voltage (DC)=30V, Max Surge Current=5.5A, Mount="Surface Mount", Number of Pins=2, Output Current=500mA, Packaging="Tape and Reel", Peak Non-Repetitive Surge Current=5.5A, Peak Reverse Current=130uA, Polarity=Standard, Radiation Hardening=No, REACH SVHC="No SVHC", Voltage Rating (DC)=30V, Weight=0.03g, Width=1.6mm
J1 J2 J3 J4: Package=None, Availability=Unavailable, MF="Samtec Inc.", Price=None, System=Connector
  J1 J2: MP=TFM-115-02-L-D
  J3 J4: MP=SAMTEC-SFM-115-02-X-D-A
L1 L2: library part CMP-06042-002074-1, "Wire Wound Ferrite Inductor for Power Lines 10μH ±20% 0.228Ω 1280mA 1212", Case Code (Imperial)=1212, Case Code (Metric)=3030, Current Rating=1.28A, DC Resistance (DCR)=228mR, Inductance=10uH, Max Operating Temperature=85°C, Min Operating Temperature=-40°C, Resistor Type=Wirewound, Saturation Current=810mA, Self Resonant Frequency=20MHz, Test Frequency=1MHz, Tolerance=20%, Case/Package=1212, Core Material=Ferrite, Mount="Surface Mount", Packaging="Tape and Reel", Shielding=Shielded
P1 P2 P3 P4: library part CMP-1502-01061-1, "THT Angled Pin Header WR-PHD, Pitch 2.54 mm, Single Row, 3 pins", Contact Resistance=20mOhm, Manufacturer="Wurth Elektronik", Operating Temperature=-40to105degC, Package Reference=61300311021, Rated Current=3A, Withstanding Voltage=500VAC, Working Voltage=250VAC, Datasheet URL=https://katalog.we-online.de/em/datasheet/6130xx11021.pdf, Gender=Male, Manufacturer URL=http://www.we-online.de, Mounting Technology=THT, Orientation=Angled, Packaging=Bag, Part Number=61300311021, Pin Number=3, Pitch=2.54mm, Publisher=WurthElektronik, Row Number=Single
R1 R22 R23 R24 R25 R26 R27: library part CMP-2001-04901-1, Manufacturer="Vishay Dale", Part Number=CRCW0805100RFKEA
R2: library part CMP-2001-04310-1, Manufacturer="Vishay Dale", Part Number=CRCW0805196KFKEA
R3 R5: library part CMP-2001-00073-1, Manufacturer=Panasonic, Part Number=ERJ-6ENF2492V
R4 R7 R8 R9 R13 R14 R15 R19: library part CMP-1659-00013-4, "Chip Resistor, 10 KOhm, +/- 1%, 0.125 W, -55 to 155 degC, 0805 (2012 Metric), RoHS, Tape and Reel", Manufacturer=Yageo, Max Operating Temperature="155 degC", Min Operating Temperature="-55 degC", Package Quantity=5000, Voltage Rating="150 V", ComponentLink1Description="Manufacturer URL", ComponentLink1URL=http://www.yageo.com/, ComponentLink2Description=Datasheet, ComponentLink2URL=http://www.yageo.com/documents/recent/PYu-RC_Group_51_RoHS_L_04.pdf, DatasheetVersion="Rev. 4, 02/2016", Height="0.5 mm", Length="2 mm", Mount="Surface Mount", Mounting Technology="Surface Mount", PackageDescription="2-Pin Surface Mounted Device, Body 2 x 1.25 mm", PackageReference=0805, Packaging="Tape and Reel", Pins=2, REACH SVHC="No SVHC", RoHSCompliant=true
R6: library part CMP-2001-00522-1, Manufacturer=Panasonic, Part Number=ERJ6ENF2203V
R10 R11 R12 R16 R17 R18: library part CMP-2001-01407-1, Manufacturer=Yageo, Part Number=RC0805JR-0791KL
R21: library part CMP-2001-00549-5, "Chip Resistor, 470 Ohm, +/- 1%, 0.125 W, -55 to 155 degC, 0805 (2012 Metric), RoHS, Tape and Reel", Manufacturer=Panasonic, Max Operating Temperature="155 degC", Min Operating Temperature="-55 degC", Package Quantity=1, Voltage Rating="150 V", ComponentLink1Description="Manufacturer URL", ComponentLink1URL=http://www.panasonic.com/, ComponentLink2Description=Datasheet, ComponentLink2URL=http://industrial.panasonic.com/cdbs/www-data/pdf/RDA0000/AOA0000C86.pdf, DatasheetVersion=04/2015, Height="0.6 mm", Length="2 mm", Mount="Surface Mount", Mounting Technology="Surface Mount", PackageDescription="2-Pin Surface Mount Device, Body 2 x 1.25 mm", PackageReference=0805, Packaging="Cut Tape", Pins=2, REACH SVHC=Yes, RoHSCompliant=true
S1: "Slide Switch 6PDT Through Hole, Right Angle", Package=None, Availability=Unavailable, MF=E-Switch, MP=EG6201, Price=None, SnapEDA_Link=https://www.snapeda.com/parts/EG6201/E-Switch/view-part/550164/?ref=snap
U1: library part CMP-09138-000207-1, "IC REG LINEAR 2V 150MA 5TSOT", Case/Package=SOT-23-5, Dropout Voltage=105mV, Max Input Voltage=5.5V, Max Operating Temperature=125°C, Max Output Current=150mA, Max Supply Current=320uA, Min Current Limit=190mA, Min Input Voltage=2.2V, Min Operating Temperature=-40°C, Min Output Voltage=2V, Operating Supply Current=10uA, Power Supply Rejection Ratio (PSRR)=70dB, Quiescent Current=22uA, Accuracy=1%, Contact Plating=Tin, Lead Free="Contains Lead", Mount="Surface Mount", Number of Outputs=1, Number of Pins=5, Number of Regulators=1, Output Configuration=Positive, Output Current=150mA, Output Type=Fixed, Output Voltage=2V, Packaging="Cut Tape", Polarity=Positive, RoHS Compliant=Yes, Series=-
U2: library part CMP-0244-00345-1, "150 mA Low Quiescent Current Low Noise Voltage Regulator, 1.0V, 5-Pin SOT-23, Tape and Reel", ComponentLink1Description="Manufacturer URL", ComponentLink1URL=http://www.st.com, ComponentLink2Description=Datasheet, ComponentLink2URL=http://www.st.com/internet/com/TECHNICAL_RESOURCES/TECHNICAL_LITERATURE/DATASHEET/CD00173477.pdf, DatasheetVersion=1/02/2009, PackageDescription="5-Pin SOT-23 Package, 2.9 x 1.6 mm Body, 0.95 mm Pitch, 2.8 mm Lead Span", PackageReference=SOT23-5L, PackageVersion=1/01/2008
U3: library part CMP-0318-02011-2, "Octal 12-Bit Voltage Output Digital-to-Analog Converter, 2.5 to 5.5 V, -40 to +125 degC, RU-16, Pb-Free, Tube", Generic Part Number=AD5328, Manufacturer="Analog Devices", # DAC Outputs=8, Code_JEDEC=MO-153-AB, ComponentLink1Description="Manufacturer URL", ComponentLink1URL=http://www.analog.com/en/index.html, ComponentLink2Description=Datasheet, ComponentLink2URL=http://www.analog.com/static/imported-files/data_sheets/AD5308_5318_5328.pdf, ComponentLink3Description="Package Specification", ComponentLink3URL=http://www.analog.com/static/imported-files/packages/36244347913743854010197452789RU16.pdf, ComponentLink4Description="Product URL", ComponentLink4URL=http://www.analog.com/en/digital-to-analog-converters/da-converters/ad5328/products/product.html, DatasheetVersion=Rev.F, Max V+=5.5V, Mounting Technology="Surface Mount", Op Pwr Diss=5mW, PackageDescription="16-Lead Thin Shrink Small Outline Package [TSSOP]", PackageReference=RU-16, PackageVersion=Nov-2002, Packing=Tube, PartNumber=AD5328BRUZ, Resolution (Bits)=12, RevisionNote="Component URL fixed", RoHS=Y, Settling Time=6Âµs, Single Supply=Yes
U4: library part CMP-0313-01921-2, "Single 12-Bit Analog-to-Digital Converter with Serial, SPI Interface, 3MSPS, -40 to +125 degC, RM-8, Pb-Free, Tube", Generic Part Number=AD7274, Manufacturer="Analog Devices", Channels=1, Code_JEDEC=MO-187-AA, ComponentLink1Description="Manufacturer URL", ComponentLink1URL=http://www.analog.com/en/index.html, ComponentLink2Description=Datasheet, ComponentLink2URL=http://www.analog.com/static/imported-files/data_sheets/AD7273_7274.pdf, ComponentLink3Description="Package Specification", ComponentLink3URL=http://www.analog.com/static/imported-files/packages/PKG_PDF/MSOP%28RM%29/RM_8.pdf, ComponentLink4Description="Product URL", ComponentLink4URL=http://www.analog.com/en/analog-to-digital-converters/ad-converters/ad7274/products/product.html, DatasheetVersion=Rev.0, Interface="Ser, SPI", Mounting Technology="Surface Mount", PackageDescription="8-Lead Mini Small Outline Package [MSOP]", PackageReference=RM-8, PackageVersion=Aug-2005, Packing=Tube, PartNumber=AD7274BRMZ, Resolution (Bits)=12, RoHS=Y, Throughput Rate (SPS)=3M
U6: library part CMP-0478-00153-1, "Dual Micropower DC/DC Converter with Positive and Negative Outputs, 1.2 to 15 V Vin, 10-pin SOP (MS-10), -40 to 85 degC, Pb-Free", Manufacturer="Linear Technology", ComponentLink1Description="Manufacturer URL", ComponentLink1URL=http://www.linear.com/, ComponentLink2Description=Datasheet, ComponentLink2URL=http://cds.linear.com/docs/en/datasheet/1945fa.pdf, ComponentLink3Description="Package Specification", ComponentLink3URL=http://cds.linear.com/docs/en/packaging/05081661_F_MS.pdf, DatasheetVersion="Rev. A", Mounting Technology="Surface Mount", Number of Outputs=2, PackageDescription="10-Pin Plastic MSOP, Body 3 x 3 mm, Pitch 0.5 mm", PackageReference=MS-10, PackageVersion="Rev. E, 06/2010", PartNumber=LT1945EMS#PBF, RoHS=TRUE, Vin Max(V)=15, Vin Min(V)=1.2
U7 U8 U9: library part CMP-09116-000003-2, "IC OPAMP ZERO-DRIFT 2 CIRC 8MSOP", Case/Package=MSOP, Input Bias Current=50pA, Input Offset Voltage (Vos)=1.5uV, Max Dual Supply Voltage=27.5V, Max Operating Temperature=125°C, Max Supply Voltage=55V, Min Dual Supply Voltage=2.25V, Min Operating Temperature=-40°C, Min Supply Voltage=4.5V, Operating Supply Current=830uA, Output Current per Channel=32mA, Power Supply Rejection Ratio (PSRR)=150dB, Voltage Gain=137dB, Common Mode Rejection Ratio=140dB, Gain Bandwidth Product=2.7MHz, Lead Free="Contains Lead", Mount="Surface Mount", Number of Pins=8, Packaging=Rail/Tube, Slew Rate=1.7V/µs
U10 U11: library part CMP-0794-00021-1, "High Voltage Latch-Up Proof, Triple SPDT Switches, 12.5 Ohm Ron, 16-pin SOP (RU-16), Tube", Manufacturer="Analog Devices", # Sw Functions=3, Code_JEDEC=MO-153AB, ComponentLink1Description="Manufacturer URL", ComponentLink1URL=http://www.analog.com/en/index.html, ComponentLink2Description=Datasheet, ComponentLink2URL=http://www.analog.com/static/imported-files/data_sheets/ADG5433_5434.pdf, ComponentLink3Description="Package Specification", ComponentLink3URL=http:/www.analog.com/static/imported-files/packages/36244347913743854010197452789RU16.pdf, Configuration=SPDT, DatasheetVersion="Rev. B", Max Neg Supply=-22V, Max Pos Supply=+40V, Mounting Technology="Surface Mount", PackageDescription="16-Pin Thin Shrink Small Outline Package, Body 5 x 4.4 mm, Pitch 0.65 mm", PackageReference=RU-16, PackageVersion=Nov-02, Packing=Tube, PartNumber=ADG5433BRUZ, Ron (ohms)="13.5, 12.5, 26, 14.5", t ON="160ns, 152ns, 228ns, 176ns"

## Via types
v1: diameter 28, hole 14, Top Layer to Bottom Layer, tented both sides, 169 vias

## Nets (pads, with @x,y where several pads share a name; then routed paths per layer and width w, separated by ;. In a path a pad name is that pad's centre, name@x,y a point inside that pad or via, vN(x,y) a via of type N, cw(c..) or ccw(c..) an arc to the next point about the centre after c; other vN are vias at no path point)
1V_REF: C3.1 J1.05 J3.5 R7.2 R8.2 R9.2 R13.2 R14.2 R15.2 R21.2 U2.5 | length 5053.1
  Top Layer w10: R13.2 -1163.98,207.88 v1(-1163.98,153.58) ; R9.2 -654.75,161.26 -647.07,153.58 v1(-642.2,153.58) -642.2,292.76 -596.02,338.94 -502.51,338.94 -418.95,422.51 v1(-358.59,422.51) ; R7.2 -228.46,239.7 -248.15,259.38 -248.15,365.67 v1(-191.31,422.51) ; R14.2 263.05,185.67 263.05,206.88 v1(373.7,317.53) 408.15,351.98 599.35,351.98 618.92,332.4 v1(623.79,332.4) 683.39,332.4 R15.2 ; v1(686.52,601.68) 686.52,667.7 R21.2 U2.5 690.69,777.1 C3.1 ; R8.2 1224.71,87.89 v1(1228.03,91.21)
  Top Layer w20: J1.05 254.57,1117.09 254.57,1170.21 280.36,1196 393.41,1196 598.15,991.26 725.83,991.26 857.38,859.7 857.38,808.7 830.81,782.13 793.18,782.13 C3.1
  Bottom Layer w10: v1(-1163.98,153.58) v1(-642.2,153.58) ; v1(-358.59,422.51) v1(-191.31,422.51) 268.72,422.51 v1(373.7,317.53) ; v1(686.52,601.68) 623.79,538.94 v1(623.79,332.4) 657.37,298.83 820.84,298.83 870.54,348.53 1070.53,348.53 1228.03,191.03 v1(1228.03,91.21)
  other v1: 250,1098.74
2V_REF: C1.1 C5.1 C6.1 C7.1 J1.06 J3.6 U1.5 U3.8 U3.9 U4.5 | length 2419.3
  Top Layer w10: v1(-823.41,612.72) -821.23,614.9 C5.1 ; C5.1@-769.14,612.65 -687.11,612.65 -683.54,609.08 U4.5 ; U3.8@-202.97,641.32 -202.97,569.43 -145.72,512.18 -145.72,504.77 -138.83,497.88 v1(-142.28,501.32) -140.4,499.44 -63.43,499.44 6.55,569.43 C6.1 7.9,578.66 U3.9@7.9,643.07 ; v1(333.08,577.3) 333.08,623.91 328.73,628.26 C1.1 333.08,697.66 345.57,710.16 347.2,710.16 348.36,711.33 U1.5
  Bottom Layer w10: v1(-823.41,612.72) -712.01,501.32 v1(-142.28,501.32) -138.83,497.88 253.65,497.88 v1(333.08,577.3) 333.08,860.69 255.35,938.42 255.35,985.91 v1(250,991.26)
3V3: C2.1 C4.1 C8.1 C9.1 C14.1 J1.03 J1.04 J3.3 J3.4 L1.1 L2.1 U1.1 U1.3 U2.1 U2.3 U3.3 U4.1 U6.8 | length 4569.1
  Top Layer w10: L2.1 -744.87,-571.31 -734.12,-582.06 C14.1 ; L1.1@-749.74,-723.39 -744.87,-723.39 -734.12,-712.64 C14.1 ; U6.8 v1(-683.54,-659.23) -721.78,-659.23 C14.1 ; C9.1@-307.32,772.38 U3.3 ; U2.3 623.79,861.93 623.79,841.58 633.25,832.12 671.58,832.12 681.04,841.58 681.04,861.93 U2.1
  Top Layer w20: U4.1@-603.21,753.6 C8.1 -516.6,801.99 v1(-515.48,803.11) ; v1(-334.97,707.33) -313.08,729.22 -313.08,766.62 C9.1 C9.1@-307.32,772.38 ; v1(102.15,746.79) 149.48,794.12 176.73,794.12 C4.1 ; C4.1@196.01,813.4 197.8,811.62 269.82,811.62 273.56,815.36 U1.3 ; U1.3@276.7,819.75 276.7,850.14 296.77,870.21 325.15,870.21 325.91,870.96 ; J1.03 J1.04 300,922.91 325.91,897 325.91,870.96 ; U1.1 344.94,820.04 344.94,851.93 325.91,870.96 ; U2.3@609.52,855.85 596.82,843.15 C2.1 507.23,846.85 499.36,846.85 475.24,870.96 325.91,870.96
  Bottom Layer w20: v1(-683.54,-659.23) -733.15,-609.63 -885.14,-609.63 -1204.98,-289.78 -1204.98,201.94 -1107.69,299.23 -1107.69,563.18 -867.76,803.11 v1(-515.48,803.11) -419.69,707.33 v1(-334.97,707.33) -295.51,746.79 v1(102.15,746.79)
  other v1: 300,991.26 300,1098.74
!ADC_CS: J1.21 J3.21 U4.3 | length 888.6
  Top Layer w10: U4.3 -659.43,773.21 -659.43,809.14 -690.37,840.09 -690.37,901.99 -381.37,1210.99 -187.46,1210.99 -155.61,1179.14 -155.61,1118.13 J1.21
  other v1: -150,1098.74
!BME_CS: J1.29 J3.29
  other v1: -350,1098.74
!CHIP_EN: J2.19 J4.19 U10.14 U11.14 | length 2065.5
  Top Layer w10: U10.14 -256.13,34.02 -235.43,54.71 -235.43,148.49 -250.29,163.35 v1(-253.28,163.35) ; v1(276.7,-151.68) 276.7,-46.3 296.98,-26.02 U11.14
  Bottom Layer w10: v1(-253.28,163.35) -250.47,160.55 -235.07,160.55 77.17,-151.68 v1(276.7,-151.68) ; v1(-100,-991.26) -100,-778.06 277.68,-400.37 v1@277.68,-152.01
!DAC_CS: J1.23 J3.23 U3.2 | length 953.2
  Top Layer w10: v1(-475.78,915.5) -533.11,972.83 -533.11,1033.8 -379.62,1187.29 -205.86,1187.29 -200,1181.43 J1.23 ; v1(-419.69,812.49) -416.82,815.36 -290.76,815.36 -273.37,797.97 U3.2
  Bottom Layer w10: v1(-475.78,915.5) -475.78,871.44 -419.69,815.36 v1(-419.69,812.49)
  other v1: -200,1098.74
!GATE_SHDN: J1.28 J3.28 R4.2 U6.2 U6.4 | length 4196.7
  Top Layer w10: U6.2 -411.62,-678.91 -395.09,-662.39 -395.09,-639.89 ; U6.4 -454.27,-639.89 -395.09,-639.89 ; v1(85.43,-724.5) 85.43,-660.42 R4.2 -144.51,-654.63 -221.28,-577.86 -369.1,-577.86 -395.09,-603.85 -395.09,-639.89 ; v1(479.76,310.98) 480.49,310.26 480.49,177.26 v1(481.21,176.53)
  Bottom Layer w10: v1(-300,991.26) -300,962.13 -327.57,934.56 -369.95,934.56 -401.65,966.26 -471.22,966.26 -501.64,996.67 -501.64,1127.45 -449.24,1179.84 377.89,1179.84 479.76,1077.97 v1(479.76,310.98) ; v1(85.43,-724.5) 85.43,-654.96 481.21,-259.18 v1(481.21,176.53)
+11V: C15.1 C16.1 C17.2 C18.2 C19.2 C26.2 C27.2 D3.1 J2.13 J4.13 R6.1 U7.8 U8.8 U9.8 U10.1 U11.1 | length 5172.2
  Top Layer w10: v1(-1020.48,0.55) -1020.48,5.42 -1030.32,15.27 C19.2 -1030.32,136.31 -1027.01,139.62 U7.8 ; U10.1 -541.12,109.2 -519.04,131.28 -511.17,131.28 -497.47,144.98 v1(-497.47,207.22) ; D3.1 -476.43,-511.32 -409.34,-444.23 R6.1 -404.15,-442.97 -404.15,-408.51 -380.94,-385.31 -353.85,-385.31 v1(-331.81,-363.27) -281.44,-363.27 -246.79,-397.91 -246.79,-404.49 C16.1 -126.53,-524.75 -126.53,-531 ; C15.1 -126.53,-531 ; J2.13 50,-832.37 173.15,-709.22 173.15,-584.41 119.74,-531 -126.53,-531 ; U8.8 100.82,339.28 C17.2 101.46,339.13 v1(145.47,339.13) v1@148.91,342.58 ; U11.1 615.55,-77.2 617.3,-78.95 617.3,-88.99 642.91,-114.6 C26.2 676.61,-168.08 v1(677.37,-168.83) ; v1(753.28,93.65) 806.78,93.65 C18.2 808.17,102.91 836.61,131.35 836.61,169.87 839.92,173.17 U9.8
  Bottom Layer w10: v1(-1020.48,0.55) -880.35,-139.57 -877.07,-142.86 -864.84,-155.09 ; v1(-331.81,-363.27) -353.85,-385.31 -634.62,-385.31 -864.84,-155.09 ; v1@145.47,338.94 258.68,225.73 554.45,225.73 681.29,98.88 ; v1(145.47,339.13) 80.73,274.39 -427.97,274.39 -857.45,-155.09 -864.84,-155.09 ; v1(677.37,-168.83) 677.37,94.96 681.29,98.88 ; v1(753.28,93.65) 686.52,93.65 681.29,98.88
  other v1: 50,-991.26
-11V: C12.1 C13.2 C20.2 C21.2 C22.2 C24.2 C25.2 D1.2 J2.14 J4.14 R2.2 U7.4 U8.4 U9.4 U10.13 U11.13 | length 6102.5
  Top Layer w10: U7.4 -854.09,281.43 C22.2 -795.79,292.18 v1(-795.3,291.68) ; v1(-553.67,291.68) -337.77,291.68 -209.71,163.63 -208.16,163.63 C20.2@-171.8,127.26 ; U10.13 -256.26,8.43 -239.53,25.16 -179.94,25.16 C25.2 -171.08,41.89 -193.95,64.76 -193.95,72.9 v1(-197.39,76.34) ; R2.2 v1(-202.45,-716) C13.2 -126.53,-765.03 -185.85,-824.35 C12.1 -210.37,-849.86 -210.37,-857.42 -229.47,-876.51 -322.9,-876.51 -336.76,-862.65 -336.76,-830.92 D1.2 -349.76,-823.92 -488.26,-962.42 -488.26,-1068 -411.62,-1144.64 -411.62,-1162.25 -368.86,-1205 0.43,-1205 50,-1155.43 J2.14 ; v1(-64.57,76.34) v1(-197.39,76.34) ; U8.4 -76.74,181.63 -97.75,160.61 -138.46,160.61 C20.2@-171.8,127.26 ; v1(219.53,-83.33) 219.53,-78.45 228.27,-69.71 C24.2 228.27,-16.18 244.02,-0.43 U11.13 ; C21.2 1007.33,317.53 C21.2@1009.17,315.69 ; U9.4 C21.2@1009.17,315.69 ; v1(1056.78,288.9) 1053.33,292.34 1032.51,292.34 C21.2@1009.17,315.69 ; v1(-197.39,76.34) -193.95,79.78 -193.95,89.37 -171.8,111.52 C20.2 C20.2@-171.8,127.26
  Bottom Layer w10: v1(-795.3,291.68) v1(-553.67,291.68) -467.99,291.68 -445.73,313.93 45.95,313.93 102.15,370.13 176.76,370.13 280.62,266.27 1034.15,266.27 v1(1056.78,288.9) ; v1(-202.45,-716) -152.12,-665.67 -152.12,31.06 v1(-197.39,76.34) ; v1(-64.57,76.34) -63.18,76.34 121.37,-108.2 194.65,-108.2 v1(219.53,-83.33)
  other v1: 50,-1098.74
DRAIN_SEL0: J2.22 J4.22
  other v1: -150,-1098.74
DRAIN_SEL1: J1.17 J3.17
  other v1: -50,1098.74
DRAIN_SEL2: J2.24 J4.24
  other v1: -200,-1098.74
DRAIN_SEL3: J1.15 J3.15
  other v1: 0,1098.74
DRAIN_SEL4: J1.18 J3.18
  other v1: -50,991.26
GATE1: J2.04 J4.4 S1.11 | length 753.3
  Bottom Layer w10: v1(300,-1098.74) 302,-1100.74 302,-1157.6 312.4,-1168 391.39,-1168 491.39,-1068 601.35,-1068 714.34,-955.01 714.34,-843.87 S1.11
GATE2: J2.06 J4.6 S1.14 | length 1117.6
  Top Layer w10: J2.06 246.14,-1116.38 246.14,-1179.14 264,-1197 387.85,-1197 531.82,-1053.03 661.63,-1053.03 860.23,-854.44 860.23,-660.76 S1.14
  other v1: 250,-1098.74
GATE3: J2.03 J4.3 S1.2 | length 487.9
  Bottom Layer w10: v1(300,-991.26) 300,-817.31 384.76,-732.55 S1.2
GATE4: J2.05 J4.5 S1.5 | length 781
  Bottom Layer w10: v1(250,-991.26) 252.8,-988.46 252.8,-767.68 481.43,-539.05 S1.5
GATE5: J2.10 J4.10 S1.17 | length 1466.5
  Top Layer w10: J2.10@150,-1155.43 J2.10
  Bottom Layer w10: v1(150,-1098.74) 152.56,-1101.3 152.56,-1157.44 192.12,-1197 387.85,-1197 486.11,-1098.74 599.05,-1098.74 962.13,-735.67 962.13,-433.67 S1.17
GATE6: J2.09 J4.9 S1.8 | length 1098.8
  Bottom Layer w10: v1(150,-991.26) 150,-766.72 571.17,-345.54 S1.8
GATE_AMP: J2.21 J4.21 R19.1 U10.8 U10.9 U10.15 U11.8 U11.9 U11.15 | length 3338.9
  Top Layer w10: v1(-623.61,-123.39) -594.15,-93.94 U10.8 ; U10.9 -291.12,-93.94 -266.9,-118.16 -248.75,-118.16 -229.81,-137.1 -183.82,-137.1 R19.1 -78.63,-145.48 91.37,24.52 v1(171.48,24.52) ; U10.15 -263.55,59.61 -257.7,65.47 -257.7,112.76 v1(-290.79,145.86) ; v1(313.68,-138.69) 313.68,-78.34 334.71,-57.31 336.23,-57.31 341.93,-51.61 U11.15 ; U11.9 v1(366.57,133.17) 541.17,133.17 568.61,105.73 568.61,103.68 570.35,101.93 U11.8
  Bottom Layer w10: v1(-623.61,-123.39) -621.82,-121.6 v1(-245.31,-121.6) ; v1(-290.79,145.86) -245.31,100.38 v1(-245.31,-121.6) ; v1(-150,-991.26) -150,-893.09 -276.39,-766.7 -276.39,-481.76 -179.94,-385.31 -179.94,-186.97 v1(-245.31,-121.6) ; v1(313.68,-138.69) 313.68,-117.68 v1(171.48,24.52) 280.13,133.17 v1(366.57,133.17)
GND: C1.2 C2.2 C3.2 C4.2 C5.2 C6.2 C7.2 C8.2 C9.2 C13.1 C14.2 C15.2 C17.1 C18.1 C19.1 C20.1 C21.1 C22.1 C24.1 C25.1 C26.1 C27.1 D2.1 J1.01 J1.02 J1.07 J1.08 J1.11 J1.13 J1.14 J1.16 J1.19 J1.24 J1.27 J2.01 J2.02 J2.07 J2.08 J2.11 J2.12 J2.15 J2.16 J2.20 J2.23 J2.28 J3.1 J3.2 J3.7 J3.8 J3.11 J3.13 J3.14 J3.16 J3.19 J3.24 J3.27 J4.1 J4.2 J4.7 J4.8 J4.11 J4.12 J4.15 J4.16 J4.20 J4.23 J4.28 R3.1 R4.1 R5.2 R19.2 R21.1 U1.2 U2.2 U3.1 U3.14 U4.4 U4.7 U6.3 U6.7 U6.9 U10.16 U11.16 | length 2858.1
  Top Layer w10: v1(-979.63,3.54) -979.63,8.41 -971.27,16.77 C19.1 ; v1(-944.15,270.51) -944.06,270.6 -916.1,270.6 -902.4,284.3 C22.1 ; v1(-834.58,-645.63) -794.43,-645.63 C14.2 ; v1(-823.41,659.79) -809.24,673.96 C5.2 -757.7,687.66 -743.01,687.66 -683.54,747.12 U4.4 ; D2.1 v1(-703.7,-876.51) ; U4.7@-633.84,607.85 U4.7 -630.88,604.9 -630.88,574.97 -615.82,559.91 -578.12,559.91 -571.29,566.74 v1(-566.42,566.74) ; U6.9 v1(-559.61,-678.91) v1@-539.92,-659.23 ; U6.7 -559.61,-639.54 v1@-539.92,-659.23 ; v1(-516.6,652.29) C8.2 ; U6.3 v1@-538.28,-659.23 ; v1(-443.68,204.3) -443.68,158.12 -424.71,139.15 -424.71,124.39 -385.52,85.2 U10.16 ; v1(-412.52,766.62) -372.14,766.62 C9.2 ; R3.1 -276.39,-633.65 v1(-233.43,-633.65) ; v1(-260.67,829.11) -255.8,829.11 -250.98,824.28 -211.94,824.28 U3.1 ; R5.2 v1(-202.45,-531) ; v1(-242.71,-212.97) -178.82,-212.97 R19.2 ; C7.2 -98.21,577.3 ; C20.1 -63.75,119.39 v1(-62.94,118.57) ; C25.1 -65.85,34.02 v1(-65.27,34.6) ; v1(-106,530.44) -102.56,533.89 -102.56,555.31 -98.21,559.66 -98.21,577.3 ; C6.2 -98.21,577.3 ; C13.1 -19.91,-720.25 v1(41.75,-720.25) ; C15.2 -19.25,-585.42 v1(31.72,-585.42) 33.37,-583.76 R4.1 ; U3.14 68.62,772.38 79.03,782.79 v1(83.9,782.79) ; C17.1 v1(42.02,391.51) ; C24.1 172.82,-27.66 v1(172.82,-77.2) ; C4.2@193.31,743.77 191.26,743.77 177.56,730.07 177.56,686.31 184.63,679.24 184.86,679.24 199.78,664.32 v1(204.65,664.32) 236.36,632.61 C1.2 274.02,676.79 310.96,713.73 U1.2 ; v1(350,-124.21) 350,-119.34 366.57,-102.77 U11.16 ; C2.2 512.9,782.13 v1(561.09,782.13) ; R21.1@613.04,674.93 R21.1 634.62,649.42 634.62,614.84 642.8,606.66 v1(642.8,601.79) ; U2.2 v1(652.41,915.99) 737,915.99 788.14,864.85 C3.2 ; v1(721.74,-169.66) 721.74,-169.41 735.67,-155.49 C26.1 ; C18.1 867.31,94.96 v1(910.73,94.96) ; v1(907.25,317.53) 940.4,317.53 C21.1 ; v1@-539.92,-659.23 v1@-538.28,-659.23 ; v1@-539.92,-659.23 v1@-538.28,-659.23
  other v1: -300,-1098.74 -100,-1098.74 0,-1098.74 100,-1098.74 200,-1098.74 350,-1098.74 -200,-991.26 0,-991.26 100,-991.26 200,-991.26 350,-991.26 -185.58,-751.43 -539.92,-703.21 -519.04,-678.91 -538.28,-648.41 -557.96,-616.68 -523.06,-616.68 -372.14,-351 -664.84,-141.01 1003.69,9.41 1229.13,53.8 -1165.31,115.01 422.46,169.87 737,176.53 -609.72,181.63 -290.76,190.48 422.46,310.98 587.92,315.69 808.36,339.13 -372.14,386.74 -278.37,457.64 -209.71,462.16 4.98,462.16 408.15,520.71 -250.29,538.94 -427.93,920.55 -200,991.26 0,991.26 50,991.26 200,991.26 350,991.26 -300,1098.74 -100,1098.74 50,1098.74 100,1098.74 200,1098.74 350,1098.74
GPIO13: J2.18 J4.18
  other v1: -50,-1098.74
HEAT_THERM_BUFF: J2.25 J4.25
  other v1: -250,-991.26
LOW_BATT: J2.29 J4.29
  other v1: -350,-991.26
MISO: J1.22 J3.22 R1.2 | length 511
  Top Layer w10: R1.2 -577.24,873.22 -565.51,861.49 -320.7,861.49 -302.7,879.49 -205.08,879.49 -150,934.57 J1.22
  other v1: -150,991.26
MOSI: J1.30 J3.30 U3.15 | length 638.8
  Top Layer w10: v1(-384.68,907.28) -381.24,910.73 -373.84,910.73 -350,934.57 J1.30 ; U3.15 9.98,798.69 44.07,798.69 52.47,807.09 v1(57.34,807.09)
  Bottom Layer w10: v1(-384.68,907.28) -383.66,907.28 -368.54,892.17 -279.89,892.17 -246.45,858.73 30.47,858.73 53.9,835.3 53.9,810.53 v1(57.34,807.09)
  other v1: -350,991.26
NetC11_1: C11.1 L1.2 U6.10 | length 233.2
  Top Layer w10: L1.2@-749.74,-810 -640.6,-810 C11.1 C11.1@-628.83,-790.36 ; C11.1@-630.22,-790.36 -630.22,-699.43 -629.38,-698.6 U6.10
NetC11_2: C11.2 D1.1 D2.2 | length 206.9
  Top Layer w10: D2.2 -574.7,-817.81 C11.2@-571.16,-814.28 ; C11.2 -560.73,-807.28 D1.1@-478.76,-807.28
NetC12_2: C12.2 R2.1 R3.2 U6.1 | length 355.3
  Top Layer w10: U6.1 -355.06,-698.6 -343.33,-710.33 R2.1 R2.1@-341.36,-714.03 ; R3.2 R2.1@-341.36,-714.03 ; C12.2 -256.71,-824.35 -331.59,-749.47 -331.59,-723.8 R2.1@-341.36,-714.03
NetC16_2: C16.2 R5.1 R6.2 U6.5 | length 330.5
  Top Layer w10: U6.5 -454.62,-566.28 -409.34,-521 R6.2 -395.41,-531 R5.1 -306.91,-442.8 C16.2
NetD3_2: D3.2 L2.2 U6.6 | length 282.9
  Top Layer w10: L2.2 -728.53,-484.69 -717.78,-495.44 -717.78,-499.15 -711.93,-505.01 D3.2@-639.2,-505.01 ; D3.2@-639.2,-491 D3.2@-639.2,-505.01 ; U6.6 -638.36,-619.86 -639.2,-619.02 D3.2@-639.2,-505.01
NetR1_1: R1.1 U4.2 | length 111.3
  Top Layer w10: R1.1 -642.2,832.82 -632.36,822.98 U4.2
SCAN: J2.27 J4.27
  other v1: -300,-991.26
SCK: J1.20 J3.20 U3.16 U4.6 | length 1206.4
  Top Layer w10: U4.6 -656.47,604.9 -656.47,548.47 -609.32,501.32 -540.65,501.32 -461.4,580.57 -461.4,817.49 -435.4,843.49 -313.24,843.49 -295.24,861.49 -173.08,861.49 -100,934.57 J1.20 -90.43,967.91 -90.43,923.25 -12.13,844.95 -12.13,825.31 -10.39,823.56 U3.16
  other v1: -100,991.26
SOURCE_SEL0: J1.26 J3.26
  other v1: -250,991.26
SOURCE_SEL1: J1.25 J3.25
  other v1: -250,1098.74
SOURCE_SEL2: J2.17 J4.17
  other v1: -50,-991.26
SOURCE_SEL3: J2.30 J4.30
  other v1: -350,-1098.74
SOURCE_SEL4: J2.26 J4.26
  other v1: -250,-1098.74
VDS_BUFF: J1.09 J3.9
  other v1: 150,1098.74
VDS_RAW: J1.10 J3.10 U3.7 | length 999
  Top Layer w10: v1(-283.43,566.74) -283.43,621.01 -240.12,664.32 -238.61,664.32 -232.91,670.02 U3.7
  Bottom Layer w10: v1(-283.43,566.74) -279.13,566.74 -268.57,577.3 65.18,577.3 210.56,722.68 210.56,868.86 150,929.42 v1(150,991.26)
VGS1: P3.1 R24.1 U7.1 U10.3 | length 1361.9
  Top Layer w10: P3.1 -596.38,-253.57 -558.96,-216.14 -475.08,-216.14 R24.1@-443.79,-184.85 ; U7.1 -808.49,139.62 -790.56,121.69 -734.12,121.69 -723.34,110.9 -723.34,48.54 -708.82,34.02 U10.3 -540.4,33.29 -514.24,33.29 -455.52,-25.42 -455.52,-173.12 R24.1@-443.79,-184.85 ; R24.1 R24.1@-443.79,-184.85
VGS1_FILT: R24.2 S1.10 | length 1479
  Top Layer w10: R24.2 -424.11,-249.81 -391.18,-282.74 3.92,-282.74 417.54,-696.36 417.54,-736.66 380.95,-773.25 380.95,-854.95 423.05,-897.05 570.76,-897.05 S1.10
VGS1_RAW: P1.1 U3.5 U7.3 | length 1270.2
  Top Layer w10: v1(-939.84,227.01) -903.63,190.8 U7.3 -853.98,190.9 -820.8,190.9 -654.76,356.94 -540.33,356.94 -348.51,548.76 -348.51,609.02 -242.03,715.5 -238.61,715.5 -232.91,721.2 U3.5
  Bottom Layer w10: P1.1 -1021.27,303.79 -944.48,227.01 v1(-939.84,227.01)
VGS1_x1: R9.1 R12.1 U7.2 U10.4 | length 686.5
  Top Layer w10: R9.1@-763.52,159.29 R9.1 -828.16,161.26 -832.1,165.21 U7.2 -855.46,163.84 -885.45,163.84 -895.71,153.58 -895.71,106.42 -815.09,25.8 ; R12.1 -762.28,74.37 -810.86,25.8 -815.09,25.8 ; U10.4 -615.17,8.43 -647.65,-24.05 -765.23,-24.05 -815.09,25.8
VGS1_x10: R12.2 U10.2 | length 150.6
  Top Layer w10: R12.2 -638.41,79.29 -618.73,59.61 U10.2
VGS2: P3.2 R27.1 U7.7 U10.6 | length 1413
  Top Layer w10: P3.2 -1056.15,-155.09 -995.38,-215.85 -584.12,-215.85 -560.92,-192.64 -538.73,-192.64 R27.1 -517.15,-180.91 -483.13,-146.89 -483.13,-74.58 -509.26,-48.46 -510.78,-48.46 -516.48,-42.75 U10.6 -615.44,-42.75 -632.73,-60.05 -780.15,-60.05 -931.71,91.51 -931.71,110.29 -982.62,161.2 -985.61,161.2 -989.62,165.21 U7.7
VGS2_FILT: R27.2 S1.13 | length 2151.3
  Top Layer w10: R27.2 -527,-282.74 -503.14,-306.6 -23.36,-306.6 384.86,-714.81 384.86,-723.1 356.64,-751.31 356.64,-869.88 512.76,-1026 663.21,-1026 837.7,-851.51 837.7,-729.27 777.06,-668.63 758.43,-668.63 S1.13
VGS2_RAW: P1.2 U3.4 U7.5 | length 1301.4
  Top Layer w10: U7.5 -1011.6,253.16 -889.82,374.94 -865.87,374.94 ; P1.2 -865.87,443.36 -865.87,374.94 ; U3.4 -248.15,746.79 -374.45,620.48 -374.45,548.27 -547.78,374.94 -865.87,374.94
VGS2_x1: R13.1 R16.1 U7.6 U10.5 | length 772.1
  Top Layer w10: R16.1@-1097.85,297.09 R13.1 -1097.85,205.73 -1082.92,190.8 U7.6 -989.62,190.8 -985.61,186.79 -982.62,186.79 -913.71,117.88 -913.71,98.97 -772.69,-42.05 -640.19,-42.05 -615.3,-17.16 U10.5
VGS2_x10: R16.2 U10.7 | length 882.2
  Top Layer w10: R16.2@-1156.91,282.33 -1131.32,256.73 -1131.32,63.54 -989.72,-78.05 -625.28,-78.05 -615.57,-68.35 U10.7
VGS3: P3.3 R22.1 U8.1 U10.11 | length 1822.1
  Top Layer w10: P3.3 -1066.77,-56.6 -938.52,-184.85 v1(-677.32,-184.85) ; v1(-278.37,-184.85) R22.1 -355.75,-184.85 -367.48,-173.12 -367.48,-163.27 -395.09,-135.67 -395.09,-96.94 -346.6,-48.46 -345.09,-48.46 -339.39,-42.75 U10.11 -50.29,-42.75 4.98,12.52 4.98,221.69 -28.14,254.82 -53.11,254.82 U8.1
  Bottom Layer w10: v1(-677.32,-184.85) v1(-278.37,-184.85)
VGS3_FILT: R22.2 S1.1 | length 1123.2
  Top Layer w10: R22.2 -336.07,-249.81 -324.33,-261.54 27.14,-261.54 528.07,-762.47 528.07,-791.43 S1.1
VGS3_RAW: P1.3 U3.6 U8.3 | length 1452.4
  Top Layer w10: U3.6 -211.94,694.89 -237.19,694.89 -316.57,615.5 v1(-316.57,462.16) -316.57,295.94 -202.26,181.63 -111.55,181.63 -87.33,205.85 -58.06,205.85 U8.3
  Bottom Layer w10: P1.3 -748.06,462.16 v1(-316.57,462.16)
VGS3_x1: R7.1 R10.1 U8.2 U10.12 | length 707.9
  Top Layer w10: U10.12 -50.16,-17.16 -13.02,19.98 -13.02,214.1 -27.71,228.8 -30.7,228.8 -34.71,232.81 U8.2 -117.93,232.81 R7.1 R10.1@-124.82,313.93
VGS3_x10: R10.2 U10.10 | length 916
  Top Layer w10: U10.10 -50.43,-68.35 22.98,5.07 22.98,246.52 -84.26,353.77 -99.54,369.05 -178.95,369.05 -189.78,358.23 R10.2@-189.78,319.84
VGS4: P4.1 R26.1 U8.7 U11.11 | length 1630.7
  Top Layer w10: U8.7 183.44,232.81 211.75,204.5 211.75,129.44 211.34,129.03 211.34,53.97 218.95,46.35 337.53,46.35 341.93,50.75 U11.11 391.22,50.75 396.92,45.05 398.44,45.05 436.71,6.78 436.71,-97.87 389,-145.58 R26.1 398.84,-180.49 428.57,-210.22 727.9,-210.22 843.2,-94.92 1077.2,-94.92 1146.39,-25.73 P4.1
VGS4_FILT: R26.2 S1.4 | length 501.2
  Top Layer w10: R26.2 389,-369.5 574.08,-554.58 620.21,-554.58 S1.4
VGS4_RAW: P2.1 U3.10 U8.5 | length 1740.7
  Top Layer w10: U3.10 84.17,670.02 144.88,609.31 144.88,553.87 v1(48.66,457.64) 0,408.98 0,301.13 42.02,259.12 42.02,204.3 64.69,181.63 U8.5 ; v1(391.35,485.7) 823.13,485.7 P2.1
  Bottom Layer w10: v1(48.66,457.64) 363.29,457.64 v1(391.35,485.7)
VGS4_x1: R14.1 R17.1 U8.6 U11.12 | length 418.8
  Top Layer w10: U8.6 151.27,207.22 179.06,179.43 R14.1 169.22,162.7 R17.1 187.84,69.27 187.84,52.01 214.69,25.16 U11.12
VGS4_x10: R17.2 U11.10 | length 151.1
  Top Layer w10: R17.2@238.12,87.89 238.12,81 R17.2@252.8,66.32 ; R17.2 298.48,87.89 310.03,76.34 U11.10
VGS5: P4.2 R23.1 U9.1 U11.3 | length 1024.5
  Top Layer w10: R23.1 544.61,-180.49 532.88,-168.75 532.88,-158.91 525,-151.03 525,-67.82 561.09,-31.72 562.61,-31.72 568.31,-26.02 U11.3 920.91,-26.02 v1@1002.21,55.28 ; v1@1009.17,62.24 U9.1
  Bottom Layer w10: v1(1003.69,53.8) 1181.71,-124.21 P4.2
VGS5_FILT: R23.2 S1.16 | length 1122.5
  Top Layer w10: R23.2 721.74,-245.45 849.93,-117.26 962,-117.26 1136.05,-291.31 1136.05,-405.95 1045,-497 915.79,-497 S1.16
VGS5_RAW: P2.2 U3.12 U9.3 | length 1508.2
  Top Layer w10: U3.12 83.9,721.2 394.1,411 871.36,411 ; U9.3 1007.8,225.73 950.09,225.73 871.36,304.46 871.36,411 ; P2.2 885.04,411 871.36,411
VGS5_x1: R8.1 R11.1 U9.2 U11.4 | length 761.6
  Top Layer w10: U11.4 907.25,-0.43 962.13,54.44 962.13,181.72 977.8,197.4 1007.8,197.4 U9.2 1076.47,198.77 1096.68,178.55 R11.1 1096.68,92.23 R8.1
VGS5_x10: R11.2 U11.2 | length 720.3
  Top Layer w10: U11.2 1026.15,-51.61 1139.19,61.43 1139.19,132.48 1175.42,168.71 R11.2
VGS6: P4.3 R25.1 U9.7 U11.6 | length 1169
  Top Layer w10: R25.1 472.14,-43.9 566.07,50.03 592.23,50.03 U11.6 659.73,50.75 v1(777.06,168.07) 806.38,197.4 850.28,197.4 U9.7
  Bottom Layer w10: v1(777.06,168.07) 777.06,167.83 1167.33,-222.45 P4.3
VGS6_FILT: R25.2 S1.7 | length 423.1
  Top Layer w10: R25.2 472.14,-283.72 547.42,-359 753.62,-359 S1.7
VGS6_RAW: P2.3 U3.11 U9.5 | length 1397.6
  Top Layer w10: U3.11 84.04,695.61 386.64,393 804.55,393 823.97,373.58 v1(826.13,373.58) ; v1@823.09,370.53 826.13,367.48 851.65,341.96 U9.5
  Bottom Layer w10: v1(826.13,373.58) 984.22,373.58 P2.3
VGS6_x1: R15.1 R18.1 U9.6 U11.5 | length 762
  Top Layer w10: U11.5 907.38,25.16 944.07,61.84 944.07,156.92 880.64,220.34 877.65,220.34 873.64,224.36 U9.6 850.28,225.73 817.64,225.73 803.67,239.7 R18.1 761.26,243.49 R15.1
VGS6_x10: R18.2 U11.7 | length 256.9
  Top Layer w10: U11.7 593.68,77.06 659.47,77.06 705.99,123.58 705.99,210.3 704.93,211.36 704.93,221.07 R18.2
VMEAS: J1.12 J3.12 U4.8 | length 1140.5
  Top Layer w10: U4.8 -604.03,603.63 v1(-558.92,603.63)
  Bottom Layer w10: v1(-558.92,603.63) 55.89,603.63 185.43,733.18 185.43,837.42 100,922.85 v1(100,991.26)
pads on no net: J3. J4. S1.3 S1.6 S1.9 S1.12 S1.15 S1.18 S1.S1 S1.S2 S1.S3 S1.S4 U1.4 U2.4 U3.13

## Polygon pours and split planes (outlines as drawn)
GND on Bottom Layer "GND_L04_P001" (solid, pour order 1): -574.7,-598.2 -574.7,-720.25 -501.86,-720.25 -501.86,-598.2
GND on Top Layer "GND_L01_P000" (solid, pour order 0): -574.7,-598.2 -574.7,-720.25 -501.86,-720.25 -501.86,-598.2
GND on Layer 1 (split plane): 265 vertices, not listed, extent -1279.99,-1279.99 1279.99,1279.99